# Altium PCB BMS_slave.PcbDoc (part 1 of 5)
Units mm, origin at the board's own origin, x right, y up, seen from the top; angles counter-clockwise.
Board outline 124.71 x 100.58 mm, 4 copper layers (Layer 1 - Top Layer, Layer 2 - GND, Layer 3 - Signal, Layer 4 - Bottom Layer), stack 1.56 mm thick; 370 components, 202 nets, 969 pads, 371 vias.
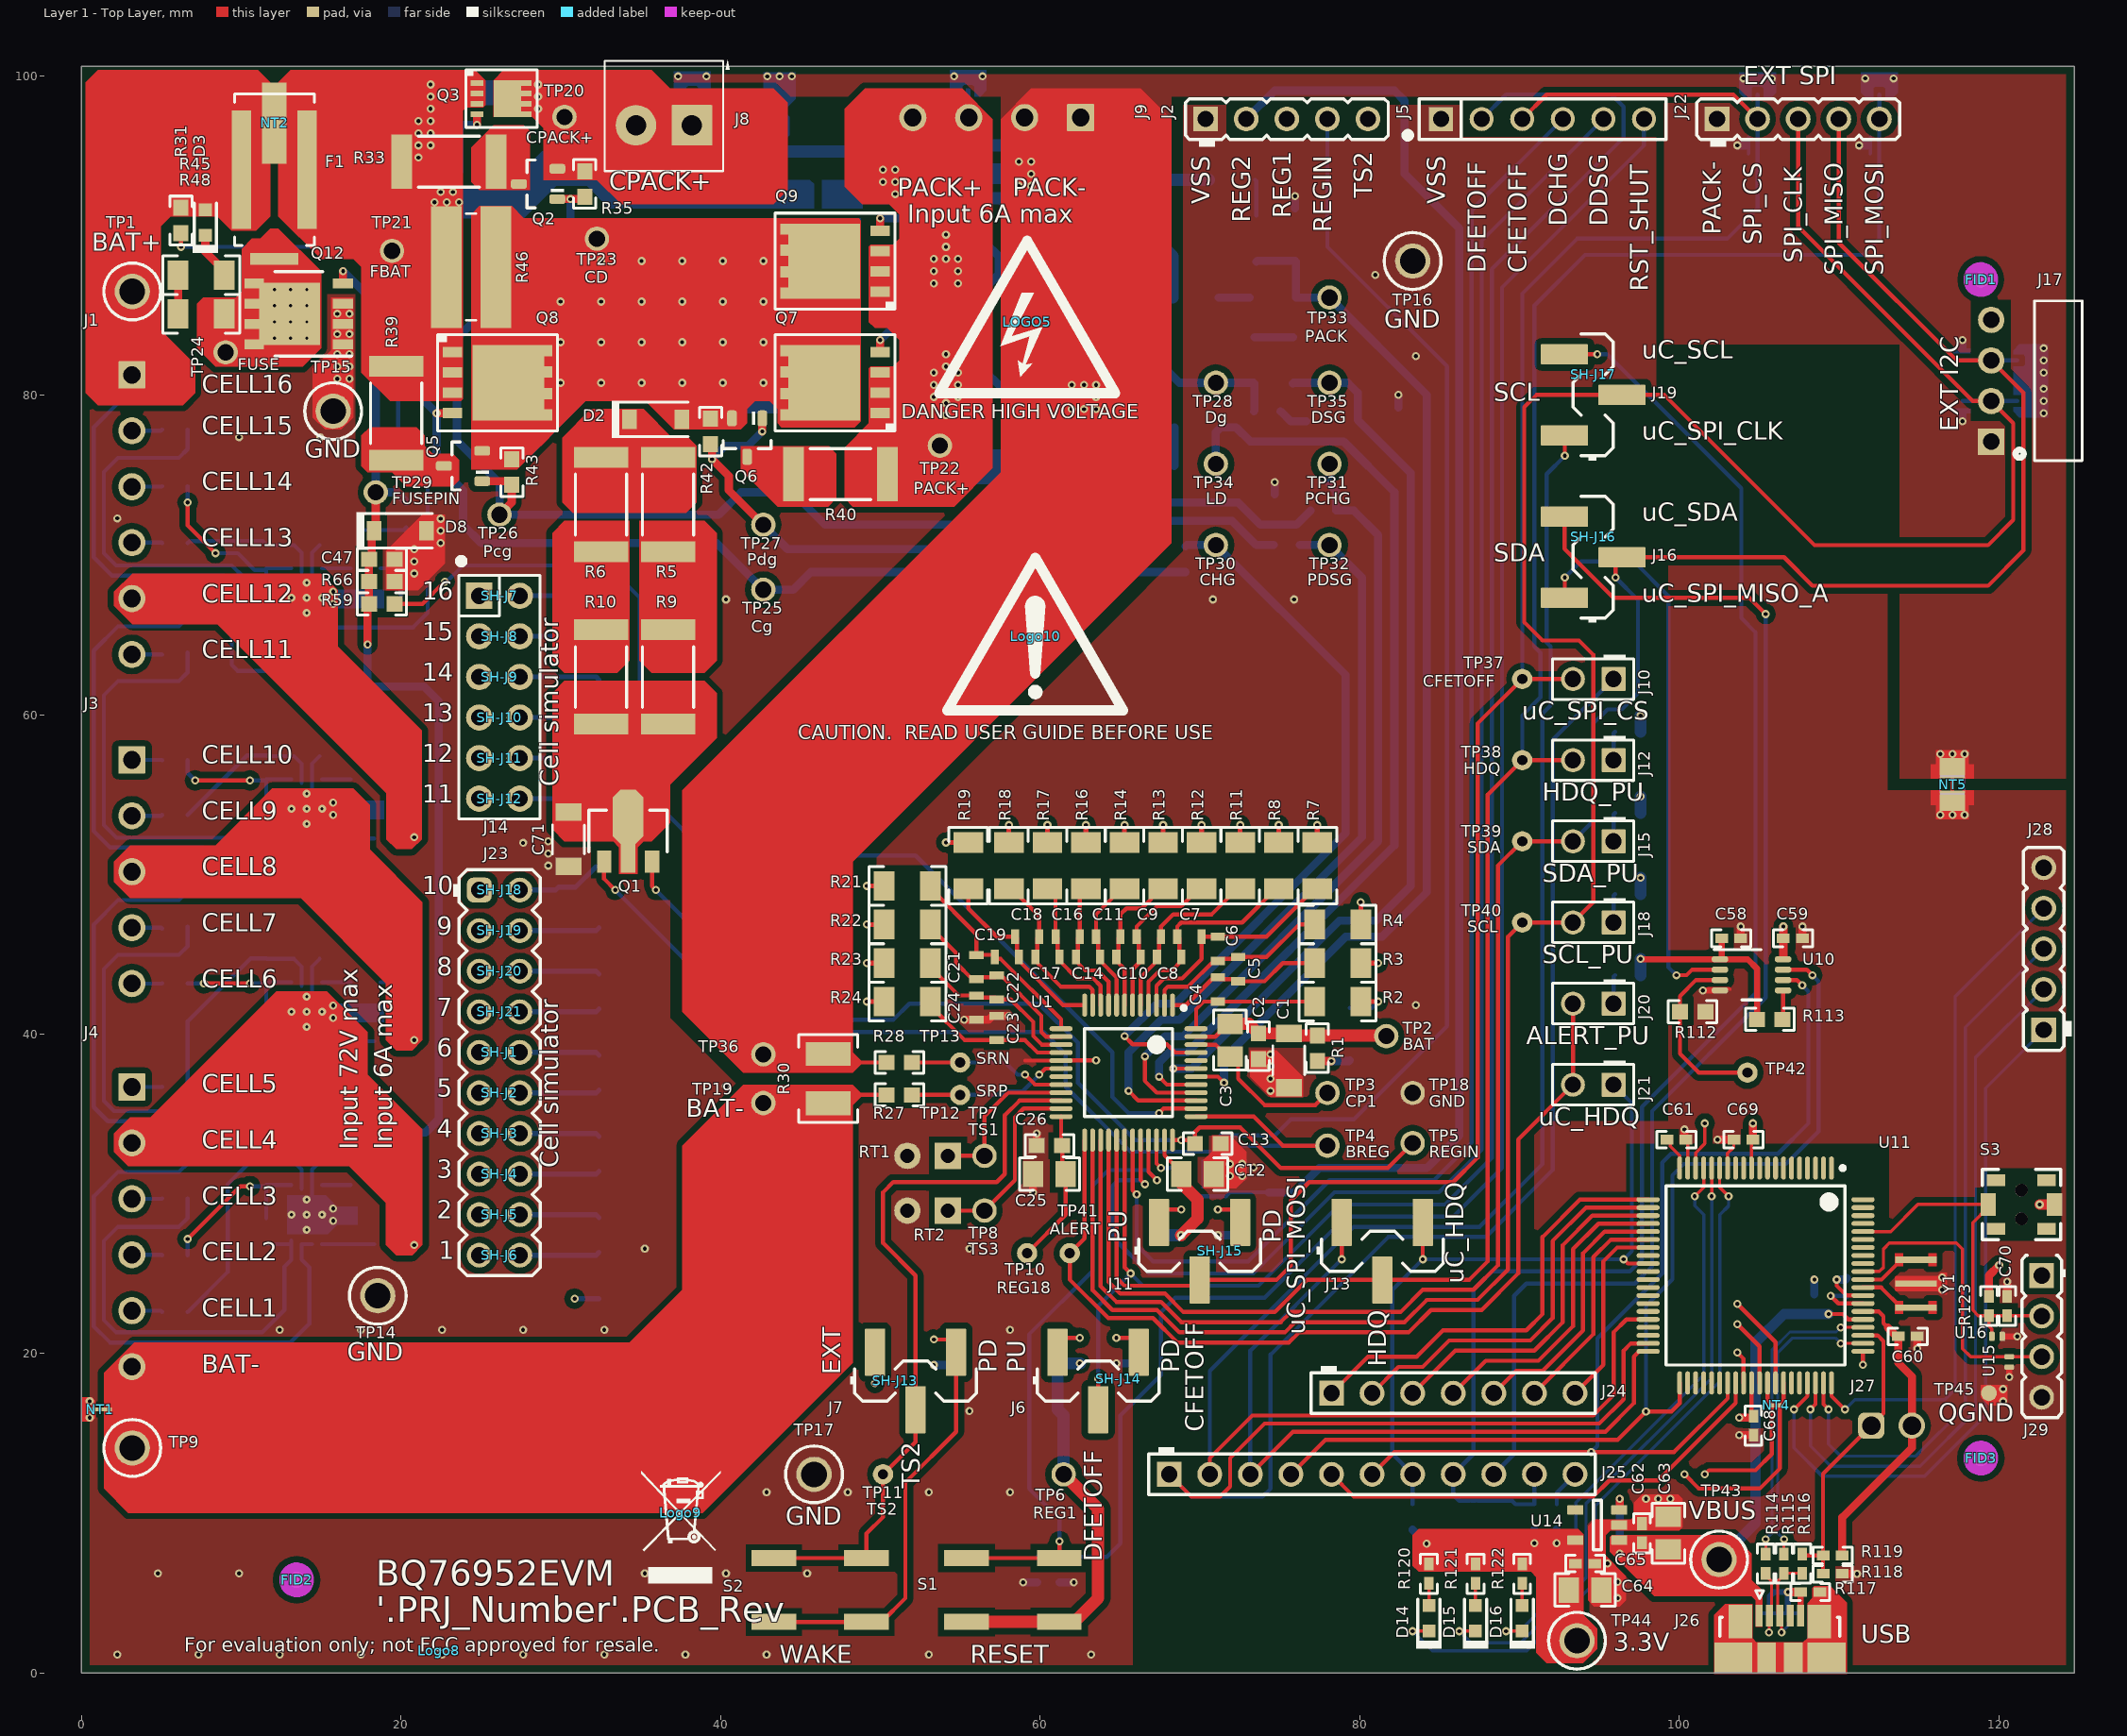
[diagram p0: Layer 1 - Top Layer view]
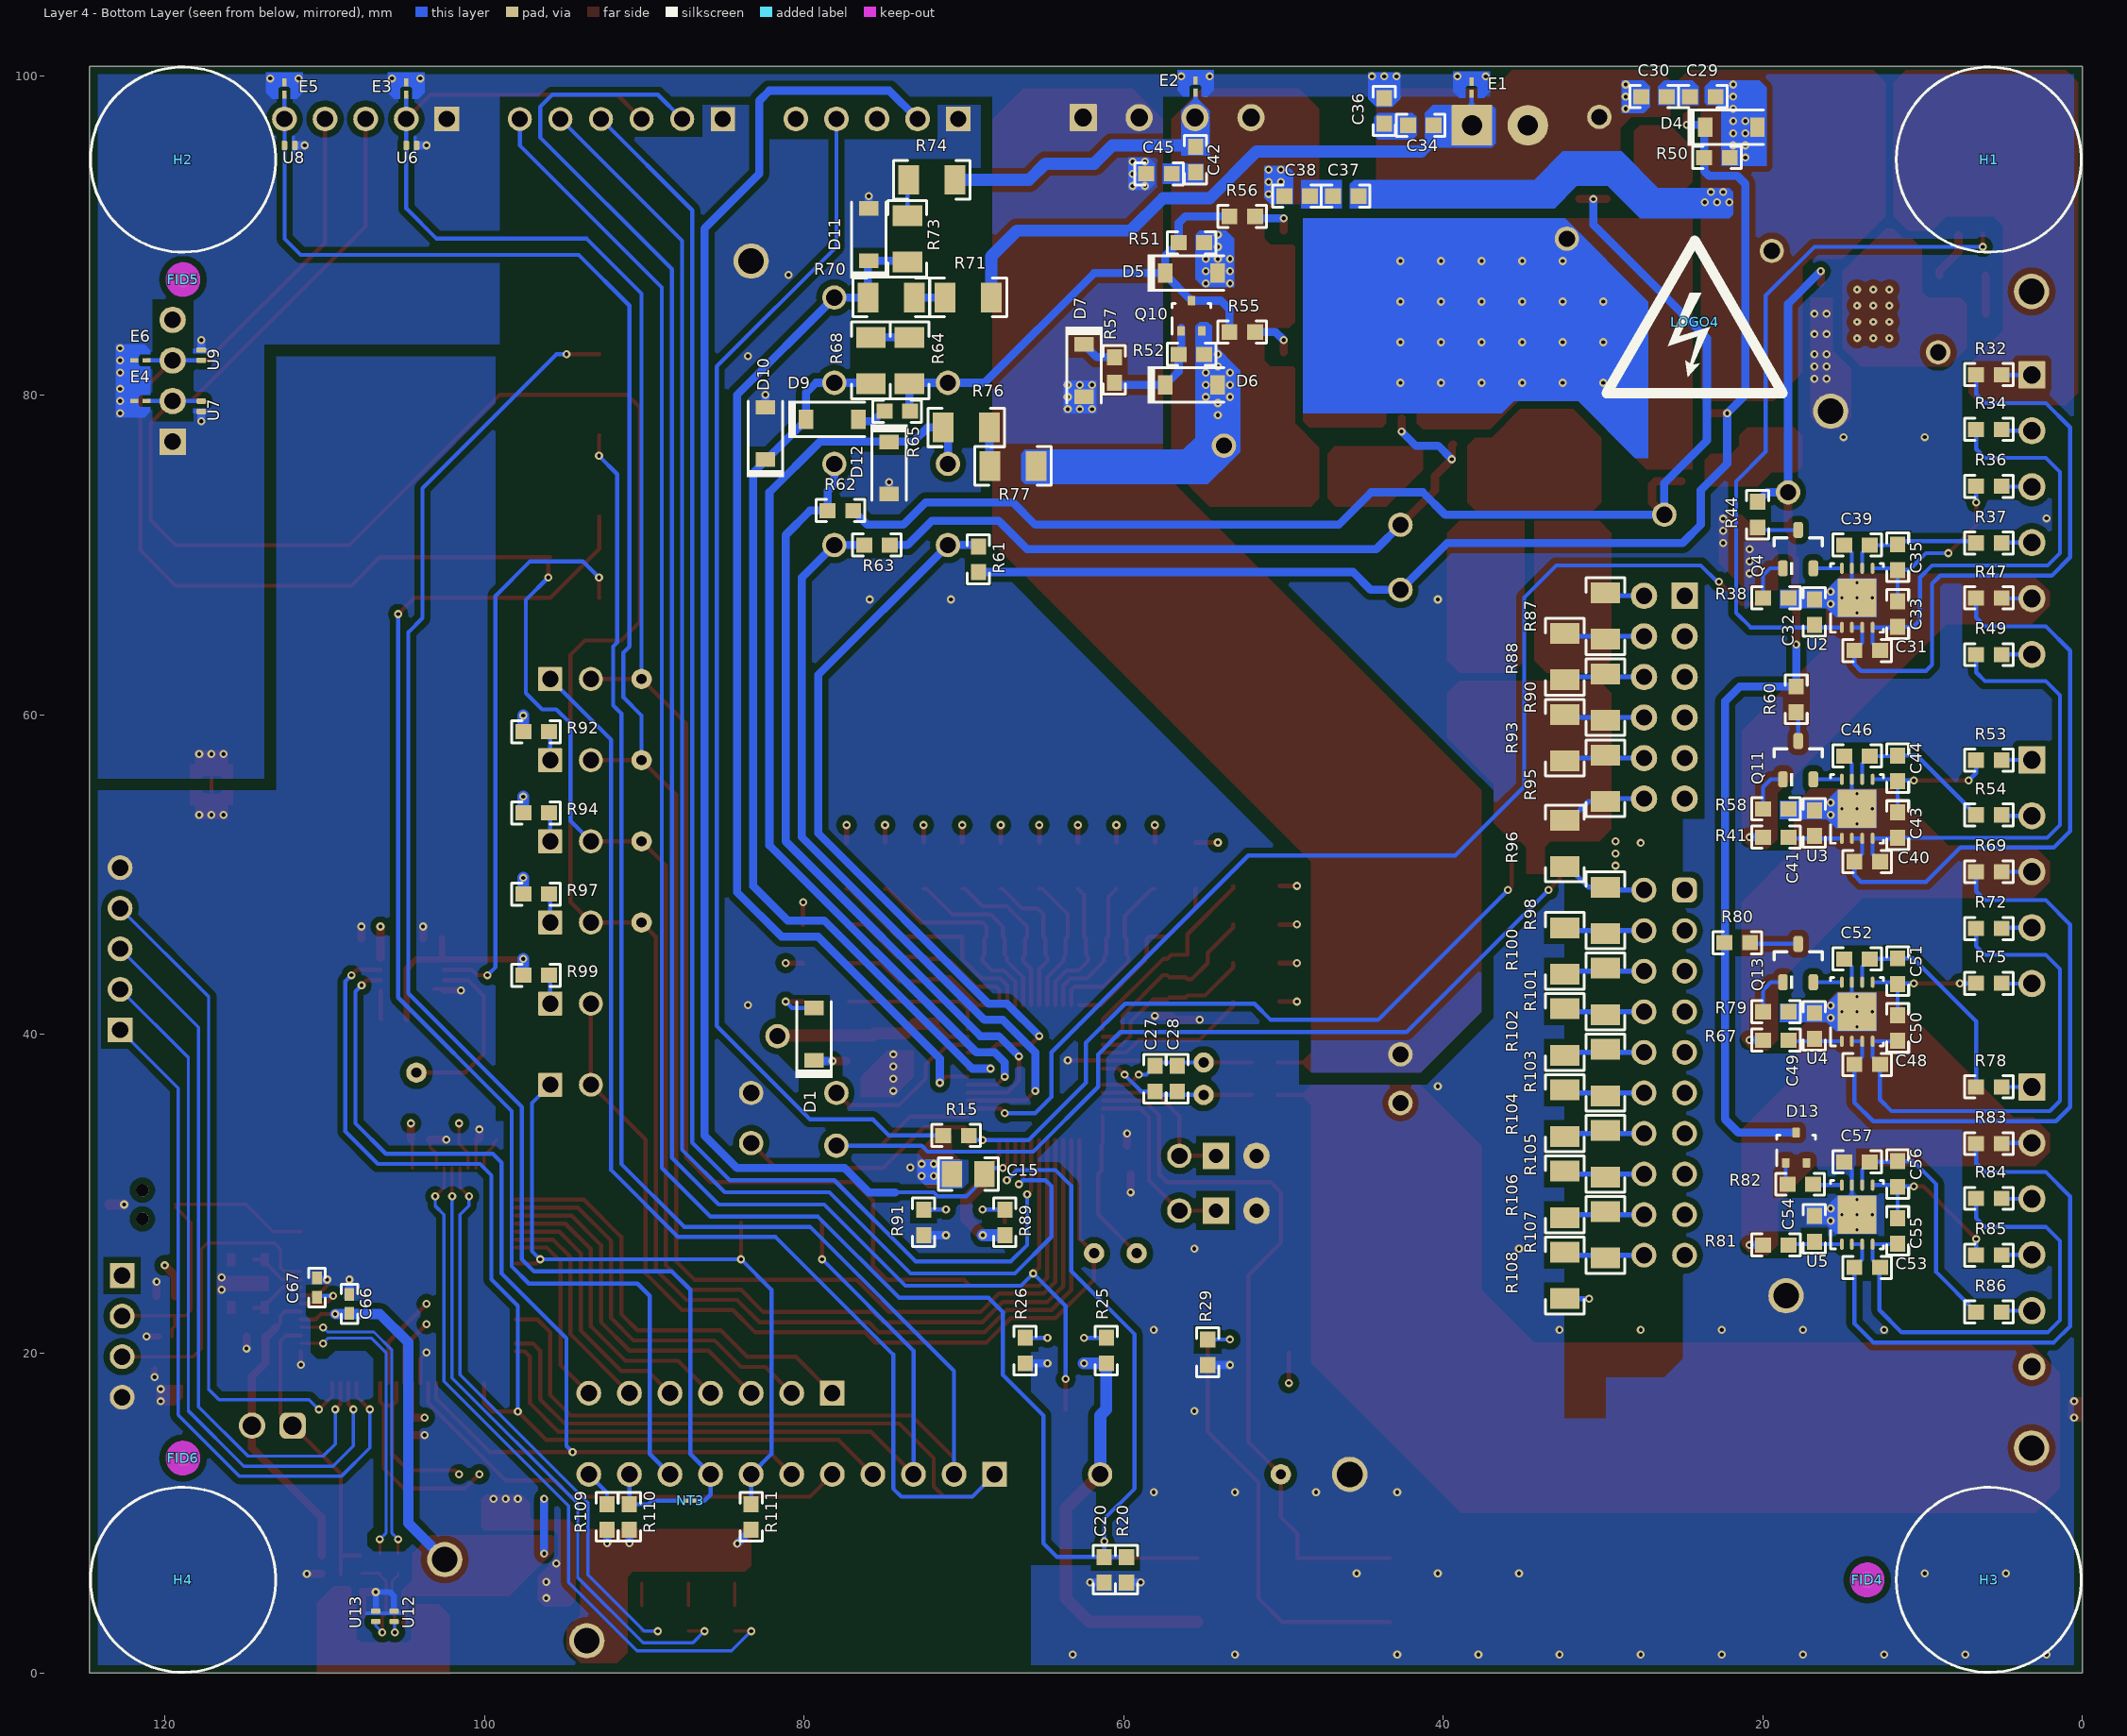
[diagram p1: Layer 4 - Bottom Layer view, seen from below]
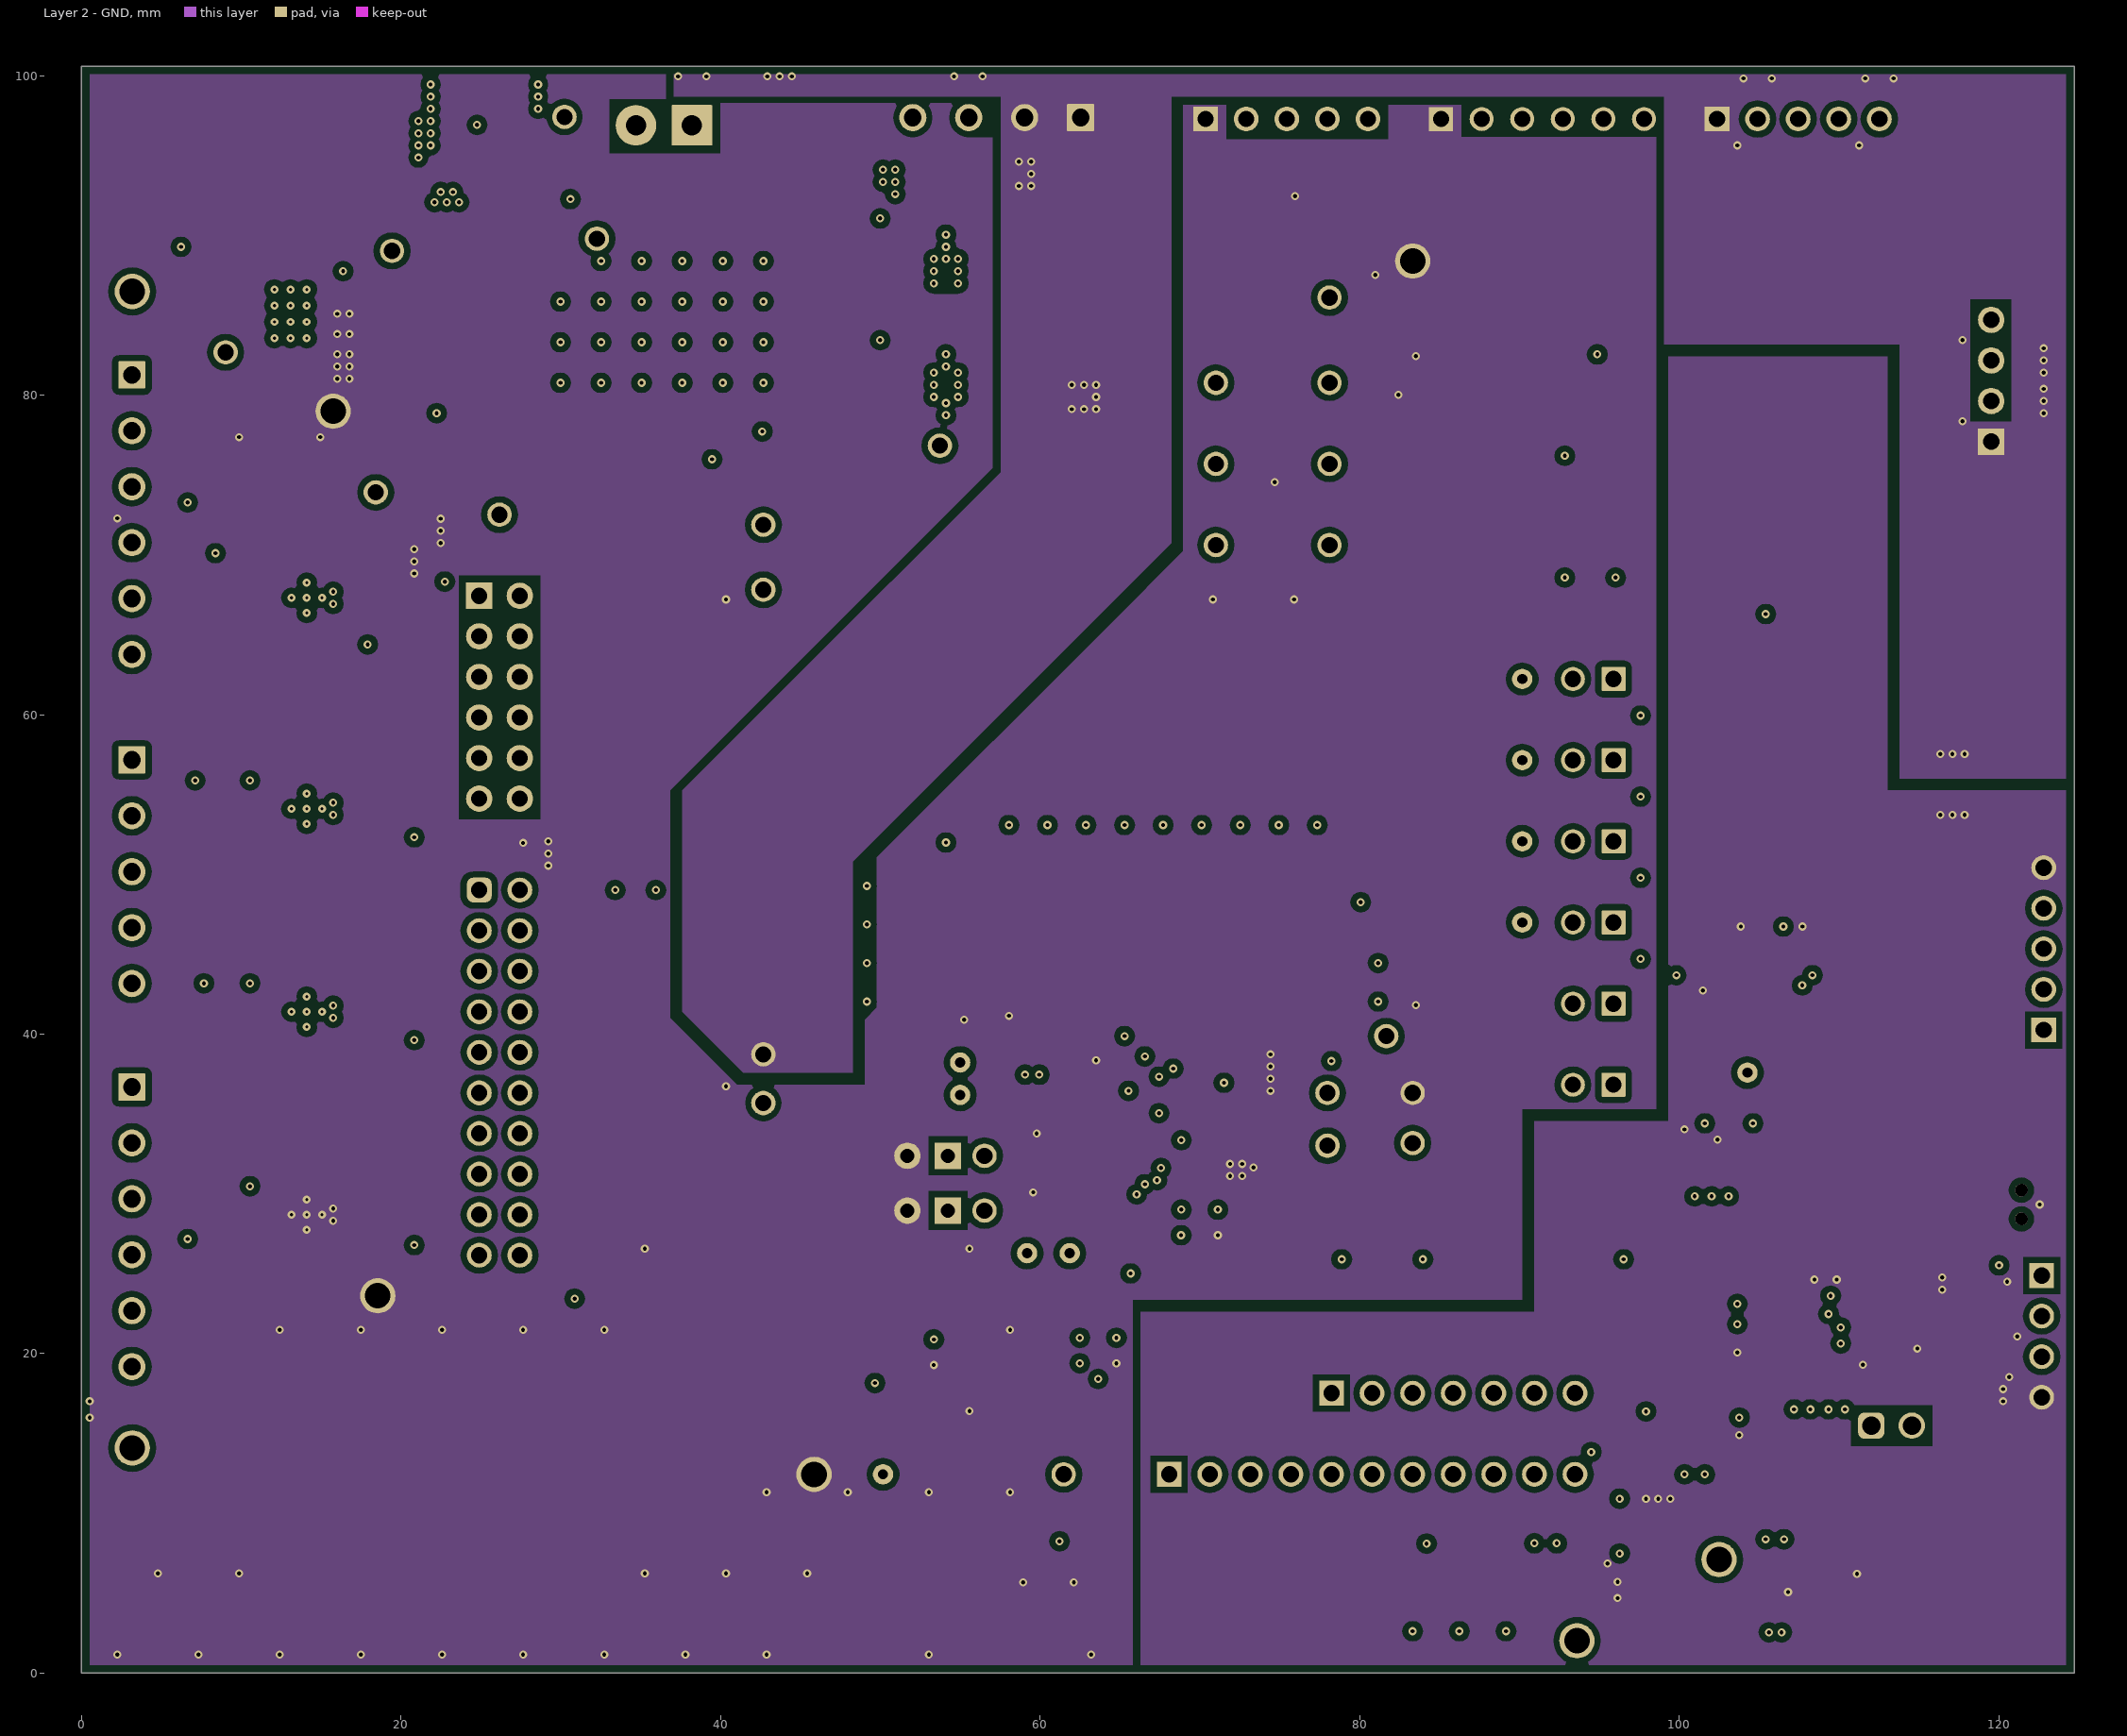
[diagram p2: Layer 2 - GND]
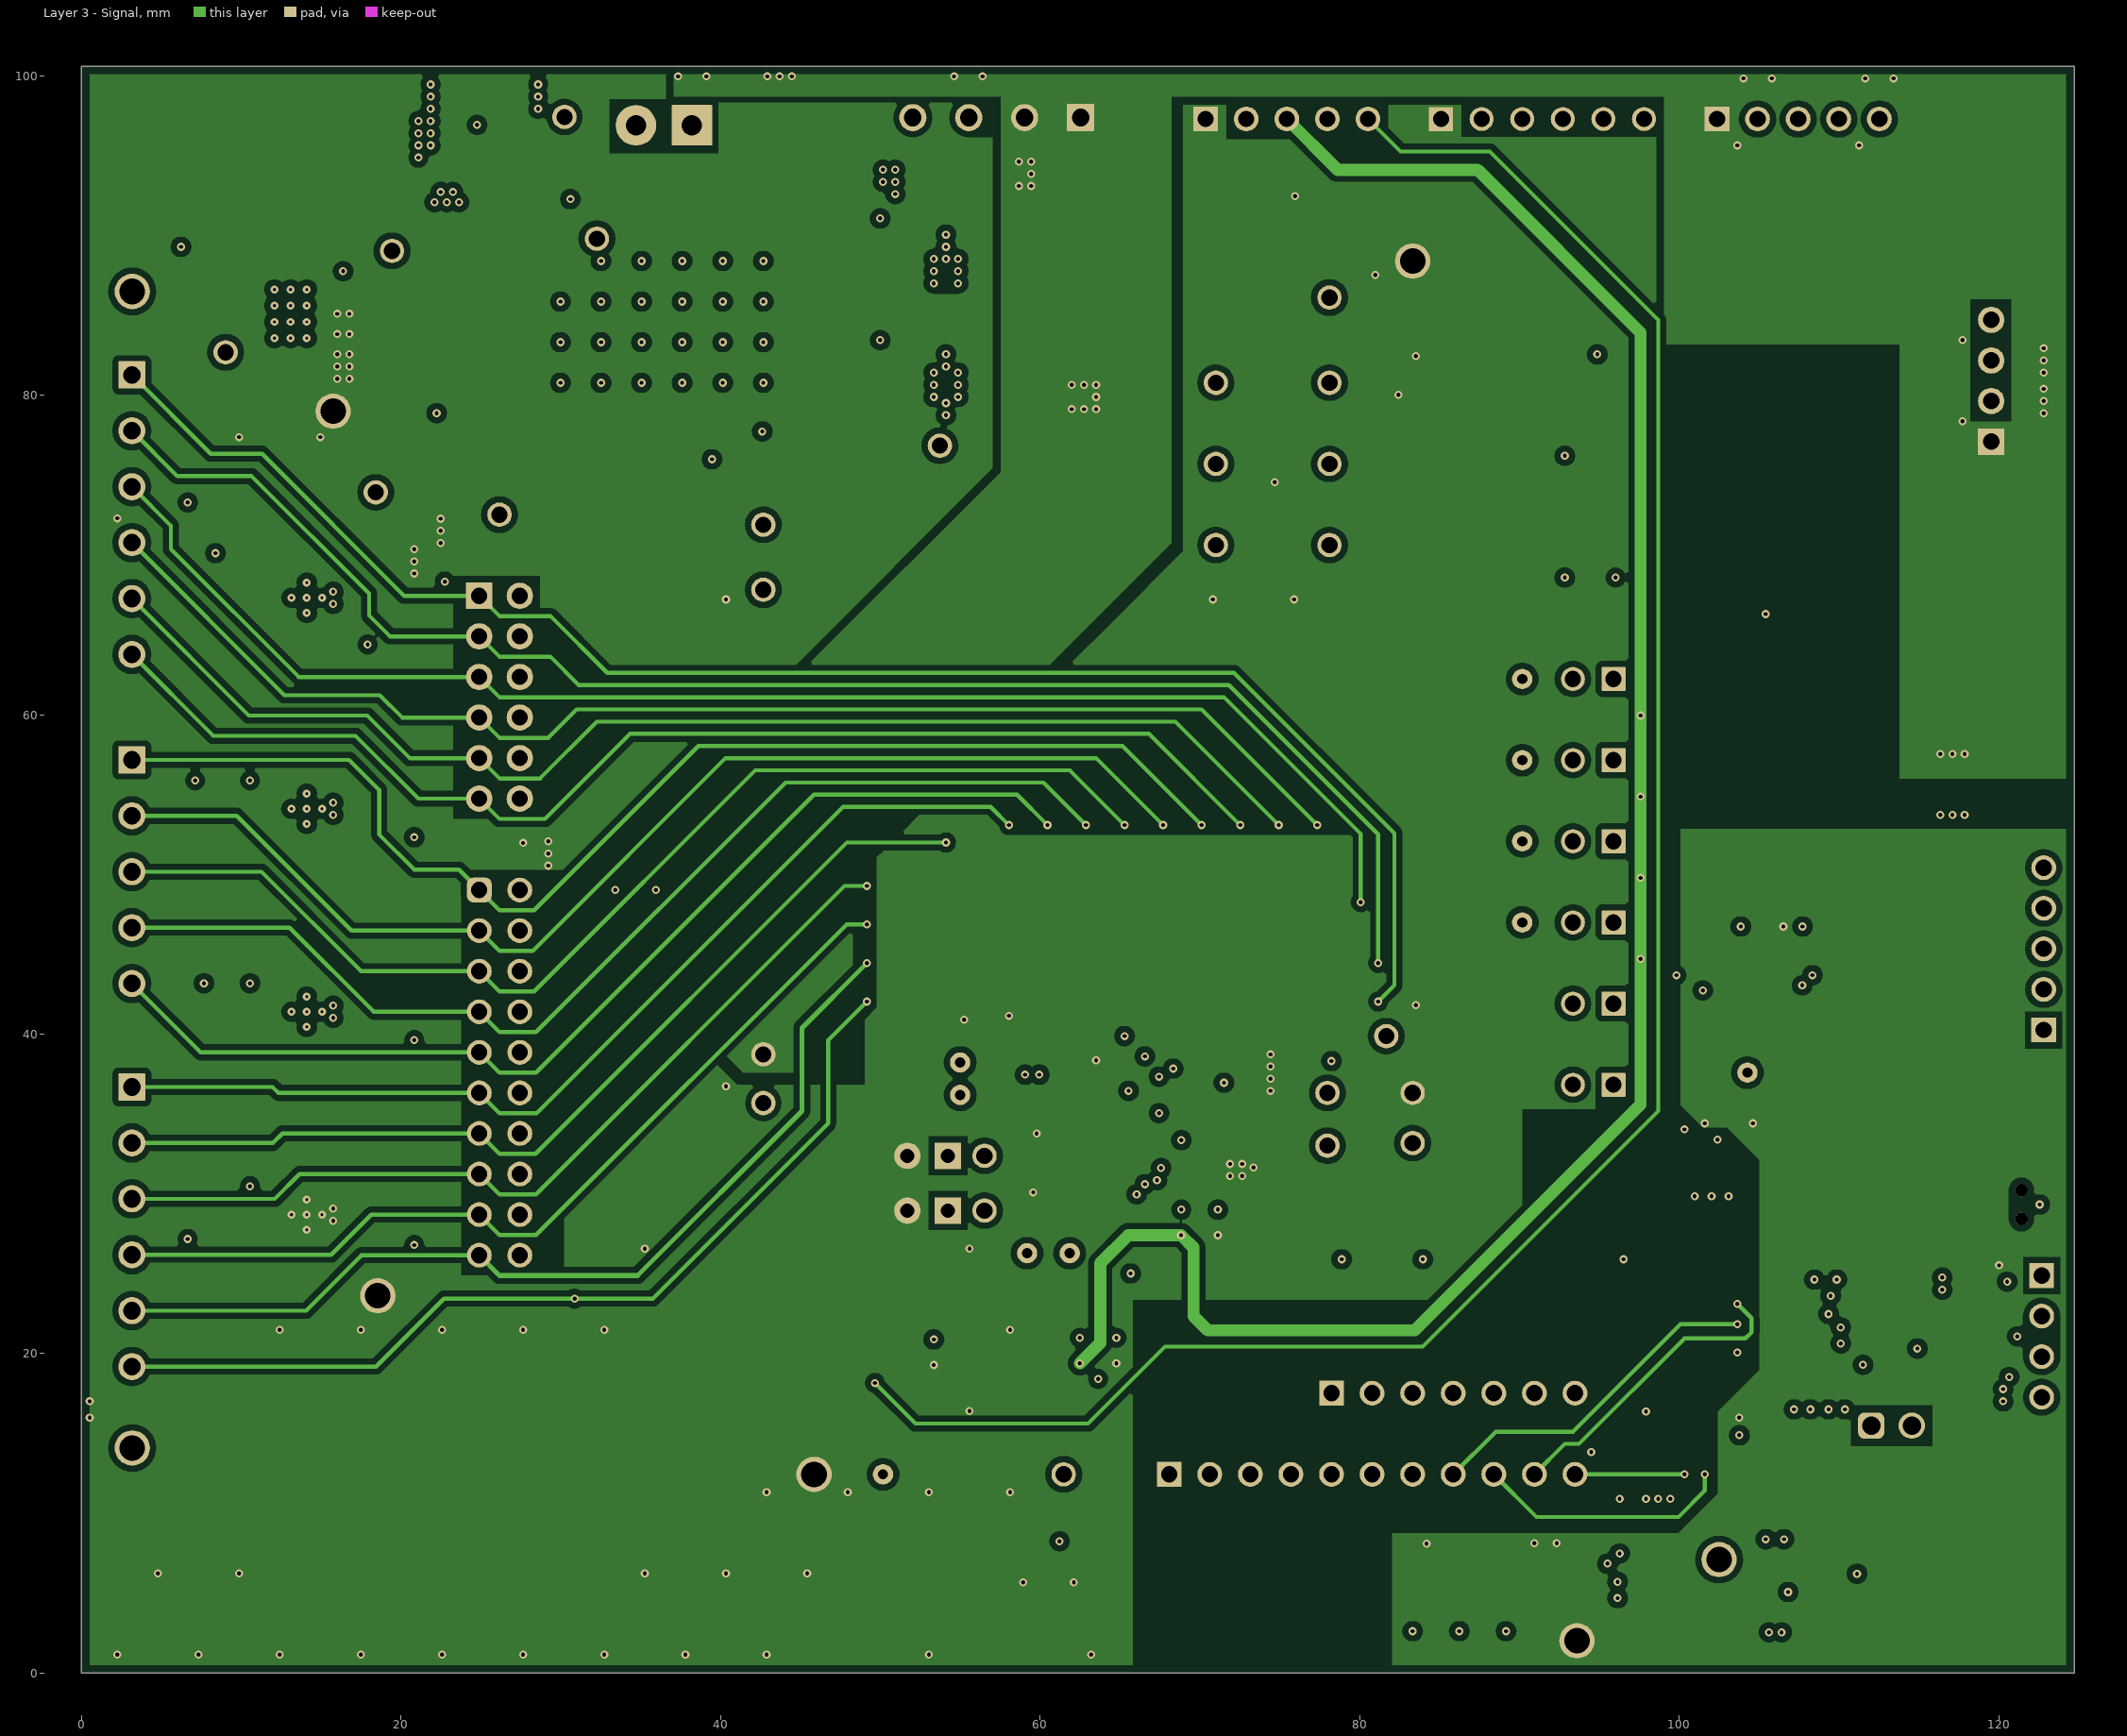
[diagram p3: Layer 3 - Signal]

## Layer stack, top to bottom
Top Solder: solder mask 0.0102, Solder Resist, Dk 3.5
Layer 1 - Top Layer: signal copper 0.0711
Dielectric 1: prepreg 0.1524, FR-4 High Tg, Dk 4.2
Layer 2 - GND: signal copper 0.0356
Dielectric 2: core 1.0414, FR-4 High Tg, Dk 4.2
Layer 3 - Signal: signal copper 0.0356
Dielectric 3: prepreg 0.1524, FR-4 High Tg, Dk 4.2
Layer 4 - Bottom Layer: signal copper 0.0711
Bottom Solder: solder mask 0.0102, Solder Resist, Dk 3.5

## Board outline
124.714,100.584 124.714,0 0,0 0,100.584

## Design rules (kind name [scope] priority, off if disabled: settings)
AcuteAngle [All] p1: minimum=4.50000000000000E+0001 checktracksonly=FALSE
AssemblyTestPointUsage [All] p1: valid=2
BoardOutlineClearance BoardOutlineClearance_MountingHoles [OnCopper and InComponentClass('Mounting Holes')] p1: gap=1 ignorepadtopadclearanceinfootprint=FALSE
BoardOutlineClearance BoardOutlineClearance_Poly [OnCopper and IsPoly] p2: gap=0.508 ignorepadtopadclearanceinfootprint=FALSE
BoardOutlineClearance [OnCopper and Not InComponentClass('Logo') and not InComponentClass('FiducialMark') and not InRegion(1000,500,4000,800) and not InPoly] p3: gap=0.457 ignorepadtopadclearanceinfootprint=FALSE
Clearance Clearance_Keepouts [((IsTrack Or IsArc) And Not InPoly) And IsFree and IsKeepOut vs ((IsTrack Or IsArc) And Not InPoly) And IsFree and IsKeepOut] p1: gap=0 ignorepadtopadclearanceinfootprint=FALSE
Clearance Clearance_Poly [InPolygon] p2: gap=0.381 ignorepadtopadclearanceinfootprint=FALSE except(0: Arc-Hole Track-Hole SMDPad-Hole THPad-Hole Via-Hole Fill-Hole Poly-Hole Region-Hole Text-Hole)
Clearance Clearance_FiducialMark [IsKeepOut and InComponentClass('FiducialMark') vs IsPad and InComponentClass('FiducialMark')] p3: gap=0 ignorepadtopadclearanceinfootprint=FALSE
Clearance [All] p4: gap=0.2 ignorepadtopadclearanceinfootprint=FALSE except(0: Arc-Hole Track-Hole SMDPad-Hole THPad-Hole Via-Hole Fill-Hole Poly-Hole Region-Hole Text-Hole)
ComponentClearance "ComponentClearance_TP / Logo" [HasFootprint('IEC_HotSurface_Medium')] p1: gap=0 collisioncheckmode=3 verticalgap=0 showdistances=FALSE // IEC_HotSurface_Medium
ComponentClearance ComponentClearance_Net-tie [HasFootprint('Net-Tie_10mil') or HasFootprint('Net-Tie_50milWide_30milLong')] p2: gap=0 collisioncheckmode=3 verticalgap=0 showdistances=FALSE
ComponentClearance ComponentClearance_MountingHoles_FiducialMarks [InComponentClass('Mounting Holes') vs InComponentClass('FiducialMark')] p3: gap=0.254 collisioncheckmode=3 verticalgap=0.254 showdistances=FALSE
ComponentClearance ComponentClearance_Shunt [HasFootprint('SNT-100-BK-G')] p4: gap=0 collisioncheckmode=3 verticalgap=0 showdistances=TRUE
ComponentClearance ComponentClearance_Logo [InComponentClass('Logo')] p5: gap=0 collisioncheckmode=3 verticalgap=0 showdistances=FALSE
ComponentClearance ComponentClearance_ScrewToNut [(HasFootprint('NY PMS 440 0025 PH')) vs (HasFootprint('Keystone_1902C'))] p6: gap=0.127 collisioncheckmode=3 verticalgap=0.254 showdistances=FALSE
ComponentClearance ComponentClearance_MountingHoles [InComponentClass('Mounting Holes')] p7: gap=6.35 collisioncheckmode=3 verticalgap=2540 showdistances=FALSE
ComponentClearance ComponentClearance_SmallPassives [HasFootprint('0201*') or HasFootprint('0402*') or HasFootprint('0508') or HasFootprint('0603*') or HasFootprint('0612') or HasFootprint('0805*') or HasFootprint('0815*') or HasFootprint('0830*') or HasFootprint('1206*') or HasFootprint('1210*') or HasFootprint('1808*') or HasFootprint('1812*') or HasFootprint('1825*') or HasFootprint('2010*') or HasFootprint('2220*') or HasFootprint('2225*') or HasFootprint('2512*') or HasFootprint('2728*') or HasFootprint('3518*') vs HasFootprint('0201*') or HasFootprint('0402*') or HasFootprint('0508') or HasFootprint('0603*') or HasFootprint('0612') or HasFootprint('0805*') or HasFootprint('0815*') or HasFootprint('0830*') or HasFootprint('1206*') or HasFootprint('1210*') or HasFootprint('1808*') or HasFootprint('1812*') or HasFootprint('1825*') or HasFootprint('2010*') or HasFootprint('2220*') or HasFootprint('2225*') or HasFootprint('2512*') or HasFootprint('2728*') or HasFootprint('3518*')] p8: gap=0.254 collisioncheckmode=3 verticalgap=0.254 showdistances=FALSE
ComponentClearance ComponentClearance_THtoSMT [IsThruComponent vs IsSMTComponent] p9: gap=0.254 collisioncheckmode=3 verticalgap=0.762 showdistances=FALSE
ComponentClearance ComponentClearance_THtoTH [IsThruComponent vs IsThruComponent] p10: gap=0.254 collisioncheckmode=3 verticalgap=0.762 showdistances=FALSE
ComponentClearance [All] p11: gap=0.254 collisioncheckmode=3 verticalgap=0.254 showdistances=FALSE
DiffPairsRouting [All] p1: maxlimit=2.54 minlimit=0.254 mostfreqgap=0.254 toplayer_minwidth=0.381 toplayer_maxwidth=0.381 toplayer_prefwidth=0.381 midlayer1_minwidth=0.381 midlayer1_maxwidth=0.381 midlayer1_prefwidth=0.381 midlayer2_minwidth=0.381 midlayer2_maxwidth=0.381 midlayer2_prefwidth=0.381 bottomlayer_minwidth=0.381 bottomlayer_maxwidth=0.381 bottomlayer_prefwidth=0.381 maxuncoupledlength=25.4
FabricationTestPointUsage TestPointUsage [All] p1: valid=2 allowmultiple=FALSE
FabricationTestpoint Testpoint [All] p1: side=3 testpointundercomponent=TRUE minsize=1.016 maxsize=2.54 preferedsize=1.524 minholesize=0 maxholesize=1.016 preferedholesize=0.813 testpointgrid=0.025 allowsidetop=TRUE allowsidebottom=TRUE usegrid=TRUE gridtolerance=0
FanoutControl Fanout_LCC [IsLCC] p1: bgadir=Out bgaviamode=Centered fanoutstyle=Auto fanoutdirection=Alternating viagrid=0.025 // Fanout_LCC (Default Rule)
FanoutControl Fanout_BGA [IsBGA] p2: bgadir=Out bgaviamode=Centered fanoutstyle=Auto fanoutdirection=Alternating viagrid=0.025 // Fanout_BGA (Default Rule)
FanoutControl Fanout_Default [All] p4: bgadir=Out bgaviamode=Centered fanoutstyle=Auto fanoutdirection=Alternating viagrid=0.025 // Fanout_Default (Default Rule)
FanoutControl Fanout_Small [(CompPinCount < 5)] p5: bgadir=Out bgaviamode=Centered fanoutstyle=Auto fanoutdirection=OutThenIn viagrid=0.025 // Fanout_Small (Default Rule)
HoleSize [All] p1: absolutevalues=TRUE maxlimit=6.375 minlimit=0.2 maxpercent=80.000 minpercent=20.000
MinimumAnnularRing MinimumAnnularRing_ThermalPadVias [IsVia and InAnyComponent] p1: minimumring=0.15
MinimumAnnularRing [All] p2: minimumring=0.127
MinimumSolderMaskSliver MinimumSolderMaskSliver_Logo [InComponentClass('Logo') vs InComponentClass('Logo')] p1: minsoldermaskwidth=0.018
MinimumSolderMaskSliver [All] p2: minsoldermaskwidth=0.099
PlaneConnect [All] p1: planeconnectstyle=Relief reliefexpansion=0.254 reliefentries=4 reliefconductorwidth=0.254 reliefairgap=0.254
PolygonConnect [All] p1: connectstyle=Direct reliefconductorwidth=0.254 reliefentries=4 polygonreliefangle="90 Angle" airgapwidth=0.254
RoutingVias ThermalPadVias [IsVia and InAnyComponent] p1: holewidth=0.2 width=0.5 viastyle="Through Hole" minholewidth=0.2 minwidth=0.5 maxholewidth=0.33 maxwidth=0.6
RoutingVias [All] p2: holewidth=0.406 width=0.864 viastyle="Through Hole" minholewidth=0.2 minwidth=0.508 maxholewidth=1.016 maxwidth=1.651
SilkToBoardRegionClearance [Not ((IsComment or IsDesignator) And (Hide <> 'False')) and not InRegion(1000,500,4000,800)] p1:
SilkToSilkClearance SilkToSilkClearance_Pb-FreeLogo [(HasFootprint('Pb-Free_Overlay_Medium') OR HasFootprint('Pb-Free_Overlay_Small')) vs (HasFootprint('Pb-Free_Overlay_Medium') OR HasFootprint('Pb-Free_Overlay_Small'))] p1: silktosilkclearance=0
SilkToSilkClearance [All] p2: silktosilkclearance=0.099
SilkToSolderMaskClearance SilkToComponentPadClearance [(IsPad or IsFill or IsRegion) and InAnycomponent] p1: minsilkscreentomaskgap=0.127 clearancetoexposedcopper=TRUE
SilkToSolderMaskClearance "Silk to Solder Mask Opening" [All] p2: minsilkscreentomaskgap=0.1 clearancetoexposedcopper=FALSE
SolderMaskExpansion [All] p1: expansion=0.05 istentingtop=FALSE
Width [All] p1: maxlimit=2.54 minlimit=0.152 preferedwidth=0.254 checkconnectedcopper=TRUE
15 further rules are at their usual default settings.

## Classes and differential pairs
component class Shunt: SH-J1 SH-J2 SH-J3 SH-J4 SH-J5 SH-J6 SH-J7 SH-J8 SH-J9 SH-J10 SH-J11 SH-J12 SH-J13 SH-J14 SH-J15 SH-J16 SH-J17 SH-J18 SH-J19 SH-J20 SH-J21
component class Header: J2 J5 J6 J7 J10 J11 J12 J13 J14 J15 J16 J18 J19 J20 J21 J22 J23 J24 J25 J27 J28 J29
component class BMS029B_PinConfig: E3 E4 E5 E6 J10 J11 J12 J13 J14 J15 J16 J17 J18 J19 J20 J21 J22 J23 R87 R88 R89 R90 R91 R92 R93 R94 R95 R96 R97 R98 R99 R100 R101 R102 R103 R104 R105 R106 R107 R108 TP37 TP38 TP39 TP40 TP41 U6 U7 U8 U9
component class BMS029B_Monitor: C1 C2 C3 C4 C5 C6 C7 C8 C9 C10 C11 C12 C13 C14 C15 C16 C17 C18 C19 C20 C21 C22 C23 C24 C25 C26 C27 C28 C71 D1 D2 J1 J2 J3 J4 J5 J6 J7 NT1 Q1 R1 R2 R3 R4 R5 R6 R7 R8 R9 R10 R11 R12 R13 R14 R15 R16 R17 R18 R19 R20 R21 R22 R23 R24 R25 R26 R27 R28 R29 R30 RT1 RT2 S1 S2 TP1 TP2 TP3 TP4 TP5 TP6 TP7 TP8 TP9 TP10 TP11 TP12 TP13 TP14 TP15 TP16 TP17 TP18 TP19 U1
component class BMS029B_Interface: C58 C59 C60 C61 C62 C63 C64 C65 C66 C67 C68 C69 C70 D14 D15 D16 J24 J25 J26 J27 J28 J29 NT3 NT4 NT5 R109 R110 R111 R112 R113 R114 R115 R116 R117 R118 R119 R120 R121 R122 R123 S3 TP42 TP43 TP44 TP45 U10 U11 U12 U13 U14 U15 U16 Y1
component class BMS029B_FETs: C29 C30 C31 C32 C33 C34 C35 C36 C37 C38 C39 C40 C41 C42 C43 C44 C45 C46 C47 C48 C49 C50 C51 C52 C53 C54 C55 C56 C57 D3 D4 D5 D6 D7 D8 D9 D10 D11 D12 D13 E1 E2 F1 J8 J9 NT2 Q2 Q3 Q4 Q5 Q6 Q7 Q8 Q9 Q10 Q11 Q12 Q13 R31 R32 R33 R34 R35 R36 R37 R38 R39 R40 R41 R42 R43 R44 R45 R46 R47 R48 R49 R50 R51 R52 R53 R54 R55 R56 R57 R58 R59 R60 R61 R62 R63 R64 R65 R66 R67 R68 R69 R70 R71 R72 R73 R74 R75 R76 R77 R78 R79 R80 R81 R82 R83 R84 R85 R86 TP20 TP21 TP22 TP23 TP24 TP25 TP26 TP27 TP28 TP29 TP30 TP31 TP32 TP33 TP34 TP35 TP36 U2 U3 U4 U5
component class BMS029B_Hardware: FID1 FID2 FID3 FID4 FID5 FID6 H1 H2 H3 H4 LOGO4 LOGO5 Logo8 Logo9 Logo10 SH-J1 SH-J2 SH-J3 SH-J4 SH-J5 SH-J6 SH-J7 SH-J8 SH-J9 SH-J10 SH-J11 SH-J12 SH-J13 SH-J14 SH-J15 SH-J16 SH-J17 SH-J18 SH-J19 SH-J20 SH-J21 ZZ1 ZZ2 ZZ3
component class FiducialMark: FID1 FID2 FID3 FID4 FID5 FID6
component class AssemblyNote: ZZ1 ZZ2 ZZ3

## Components (designator, comment, footprint, x,y, rotation, side; value= is the part's Value field where it differs from the comment)
C1 "C3216X7R2A105K160AA" 1206_180 75.565,38.354 r270 top value=1uF
C2 "GCM1885C2A101JA16D" 0603 73.66,39.243 r270 top value=100pF
C3 "GCM219R71E474KA55D" 0805_HV 71.882,39.624 r270 top value=0.47uF
C4 "C1608X7R1H224K080AB" 0603S 71.12,42.799 r90 top value=0.22uF
C5 "C1608X7R1H224K080AB" 0603S 72.39,44.069 r90 top value=0.22uF
C6 "C1608X7R1H224K080AB" 0603S 71.12,45.339 r90 top value=0.22uF
C7 "C1608X7R1H224K080AB" 0603S 69.342,46.101 r180 top value=0.22uF
C8 "C1608X7R1H224K080AB" 0603S 68.072,44.831 r180 top value=0.22uF
C9 "C1608X7R1H224K080AB" 0603S 66.802,46.101 r180 top value=0.22uF
C10 "C1608X7R1H224K080AB" 0603S 65.532,44.831 r180 top value=0.22uF
C11 "C1608X7R1H224K080AB" 0603S 64.262,46.101 r180 top value=0.22uF
C12 "EMK212B7105KG-T" 0805_HV 69.85,31.242 r180 top value=1uF
C13 "C0603C223K4RACTU" 0603 70.485,33.147 r180 top value=0.022uF
C14 "C1608X7R1H224K080AB" 0603S 62.992,44.831 r180 top value=0.22uF
C15 "EMK212B7105KG-T" 0805_HV 69.723,31.242 r180 bottom value=1uF
C16 "C1608X7R1H224K080AB" 0603S 61.722,46.101 r180 top value=0.22uF
C17 "C1608X7R1H224K080AB" 0603S 60.452,44.831 r180 top value=0.22uF
C18 "C1608X7R1H224K080AB" 0603S 59.182,46.101 r180 top value=0.22uF
C19 "C1608X7R1H224K080AB" 0603S 57.912,44.831 r180 top value=0.22uF
C20 "885012206040" 0603 61.214,6.477 r270 bottom value=0.01uF
C21 "C1608X7R1H224K080AB" 0603S 56.007,44.196 r270 top value=0.22uF
C22 "C1608X7R1H224K080AB" 0603S 57.277,42.926 r270 top value=0.22uF
C23 "C1608X7R1H224K080AB" 0603S 57.277,40.386 r90 top value=0.22uF
C24 "C1608X7R1H224K080AB" 0603S 56.007,41.656 r270 top value=0.22uF
C25 "EMK212B7225KG-T" 0805_HV 60.579,31.242 r0 top value=2.2uF
C26 "885012206040" 0603 60.579,33.02 r180 top value=0.01uF
C27 "C0603C101J5GACTU" 0603 58.039,37.211 r270 bottom value=100pF
C28 "885012206095" 0603 56.642,37.211 r90 bottom value=0.1uF
C29 "GCJ188R72A104KA01D" 0603 23.749,98.679 r180 bottom value=0.1uF
C30 "GCJ188R72A104KA01D" 0603 26.797,98.679 r180 bottom value=0.1uF
C31 "885012206095" 0603 13.462,64.008 r0 bottom value=0.1uF
C32 "885012206095" 0603 16.764,66.421 r270 bottom value=0.1uF
C33 "885012206095" 0603 11.557,66.294 r270 bottom value=0.1uF
C34 "GCJ188R72A104KA01D" 0603 41.402,96.888 r0 bottom value=0.1uF
C35 "885012206095" 0603 11.557,69.85 r270 bottom value=0.1uF
C36 "GCJ188R72A104KA01D" 0603 43.688,97.79 r90 bottom value=0.1uF
C37 "GCJ188R72A104KA01D" 0603 46.101,92.456 r180 bottom value=0.1uF
C38 "GCJ188R72A104KA01D" 0603 49.149,92.456 r180 bottom value=0.1uF
C39 "885012206095" 0603 14.097,70.612 r180 bottom value=0.1uF
C40 "885012206095" 0603 13.462,50.8 r0 bottom value=0.1uF
C41 "885012206095" 0603 16.764,53.213 r270 bottom value=0.1uF
C42 "GCJ188R72A104KA01D" 0603 55.499,94.742 r270 bottom value=0.1uF
C43 "885012206095" 0603 11.557,53.086 r270 bottom value=0.1uF
C44 "885012206095" 0603 11.557,56.642 r270 bottom value=0.1uF
C45 "GCJ188R72A104KA01D" 0603 57.785,93.853 r0 bottom value=0.1uF
C46 "885012206095" 0603 14.097,57.404 r180 bottom value=0.1uF
C47 "885012206095" 0603 18.796,69.723 r180 top value=0.1uF
C48 "885012206095" 0603 13.462,38.1 r0 bottom value=0.1uF
C49 "885012206095" 0603 16.764,40.513 r270 bottom value=0.1uF
C50 "885012206095" 0603 11.557,40.386 r270 bottom value=0.1uF
C51 "885012206095" 0603 11.557,43.942 r270 bottom value=0.1uF
C52 "885012206095" 0603 14.097,44.704 r180 bottom value=0.1uF
C53 "885012206095" 0603 13.462,25.4 r0 bottom value=0.1uF
C54 "885012206095" 0603 16.764,27.813 r270 bottom value=0.1uF
C55 "885012206095" 0603 11.557,27.686 r270 bottom value=0.1uF
C56 "885012206095" 0603 11.557,31.242 r270 bottom value=0.1uF
C57 "885012206095" 0603 14.097,32.004 r180 bottom value=0.1uF
C58 "885012205037" 0402 103.251,45.999 r180 top value=0.1uF
C59 "885012205037" 0402 107.112,45.999 r180 top value=0.1uF
C60 "885012205037" 0402 114.3,21.082 r0 top value=0.1uF
C61 "Capacitor" 0402 99.822,33.401 r0 top value=0.47uF
C62 "885012205037" 0402 97.663,8.763 r90 top value=0.1uF
C63 "CL21A106KOQNNNG" 0805_HV 99.314,8.763 r90 top value=10uF
C64 "CL21A106KOQNNNG" 0805_HV 94.107,5.207 r0 top value=10uF
C65 "885012205037" 0402 94.107,6.858 r0 top value=0.1uF
C66 "885012205037" 0402 108.458,23.114 r90 bottom value=0.1uF
C67 "Capacitor" 0402 110.49,24.13 r90 bottom value=0.47uF
C68 "885012205037" 0402 104.648,15.494 r270 top value=0.1uF
C69 "Capacitor" 0402 104.013,33.401 r180 top value=0.47uF
C70 "885012205008" 0402 120.523,22.987 r90 top value=2200pF
C71 "C3216X7R2A105K160AA" 1206_180 30.48,52.197 r270 top value=1uF
D1 "BAT46W-7-F" SOD-123 79.375,40.005 r90 bottom value=100V
D2 "BAT46W-7-F" SOD-123 35.941,78.486 r0 top value=100V
D3 "150060RS75000" WL-SMCW_RED 7.747,90.805 r90 top value=Red
D4 "MMSZ5246B-7-F" SOD-123 21.971,96.774 r180 bottom value=16V
D5 "MMSZ5246B-7-F" SOD-123 55.753,87.63 r180 bottom value=16V
D6 "MMSZ5246B-7-F" SOD-123 55.753,80.645 r180 bottom value=16V
D7 "1N4148W-7-F" SOD-123 62.484,81.534 r270 bottom value=100V
D8 "MMSZ4697T1G" SOD-123 19.939,71.501 r0 top value=10V
D9 "BAT46W-7-F" SOD-123 78.232,78.486 r180 bottom value=100V
D10 "BAT46W-7-F" SOD-123 82.423,77.597 r90 bottom value=100V
D11 "BAT46W-7-F" SOD-123 75.946,90.043 r90 bottom value=100V
D12 "BAT46W-7-F" SOD-123 74.676,75.438 r270 bottom value=100V
D13 "BAS40W-7-F" SOT-323 17.907,32.893 r90 bottom value=40V
D14 "150060VS75000" WL-SMCW_GREEN 84.328,3.429 r90 top value=Green
D15 "150060VS75000" WL-SMCW_GREEN 87.249,3.429 r90 top value=Green
D16 "150060VS75000" WL-SMCW_GREEN 90.17,3.429 r90 top value=Green
E1 "Spark Gap" SPARK_GAP2 38.227,99.365 r0 bottom
E2 "Spark Gap" SPARK_GAP2 55.499,99.441 r0 bottom
E3 "Spark Gap" SPARK_GAP2 104.902,99.314 r0 bottom
E4 "Spark Gap" SPARK_GAP2 121.666,79.629 r270 bottom
E5 "Spark Gap" SPARK_GAP2 112.522,99.314 r0 bottom
E6 "Spark Gap" SPARK_GAP2 121.666,82.169 r270 bottom
F1 "SFK-3030" FUSE_SFK-xx30x 12.065,94.107 r90 top
FID1 "Fiducial" Fiducial10-20 118.872,87.232 r0 top
FID2 "Fiducial" Fiducial10-20 13.462,5.842 r0 top
FID3 "Fiducial" Fiducial10-20 118.872,13.462 r0 top
FID4 "Fiducial" Fiducial10-20 13.462,5.842 r180 bottom
FID5 "Fiducial" Fiducial10-20 118.872,87.232 r180 bottom
FID6 "Fiducial" Fiducial10-20 118.872,13.462 r180 bottom
H1 "SJ-5303 (CLEAR)" Bumpon_SJ5003Transparent 5.842,94.742 r180 bottom
H2 "SJ-5303 (CLEAR)" Bumpon_SJ5003Transparent 118.872,94.742 r180 bottom
H3 "SJ-5303 (CLEAR)" Bumpon_SJ5003Transparent 5.842,5.842 r180 bottom
H4 "SJ-5303 (CLEAR)" Bumpon_SJ5003Transparent 118.872,5.842 r180 bottom
J1 "OSTTE060161" FP-OSTTE060161_HDR6-MFG 3.048,72.517 r270 top
J2 "PEC05SAAN" Sullins_PxC05SAAN 75.438,97.282 r0 top
J3 "OSTTE050161" FP-OSTTE050161_HDR5-MFG 3.048,50.165 r270 top
J4 "OSTTE060161" FP-OSTTE060161_HDR6-MFG 3.048,27.94 r270 top
J5 "PEC06SAAN" Sullins_PEC06SAAN 91.44,97.282 r0 top
J6 "87898-0304" Molex_87898-0304 63.627,18.288 r0 top
J7 "87898-0304" Molex_87898-0304 52.197,18.288 r0 top
J8 "ED555/2DS" TERM_BLK_ED555-2DS 38.202,96.888 r180 top
J9 "OSTTE040161" FP-OSTTE040161_HDR4-MFG 57.277,97.473 r180 top
J10 "PEC02SAAN" CONN_PEC02SAAN 94.615,62.23 r180 top
J11 "87898-0304" Molex_87898-0304 69.977,26.416 r0 top
J12 "PEC02SAAN" CONN_PEC02SAAN 94.615,57.15 r180 top
J13 "87898-0304" Molex_87898-0304 81.407,26.416 r0 top
J14 "PEC06DAAN" CONN_PEC06DAAN 26.162,61.087 r270 top
J15 "PEC02SAAN" CONN_PEC02SAAN 94.615,52.07 r180 top
J16 "87898-0304" Molex_87898-0304 94.615,69.85 r90 top
J17 "22/05/3041" CONN_22-05-3041 125.222,80.899 r90 top
J18 "PEC02SAAN" CONN_PEC02SAAN 94.615,46.99 r180 top
J19 "87898-0304" Molex_87898-0304 94.615,80.01 r90 top
J20 "PEC02SAAN" CONN_PEC02SAAN 94.615,41.91 r180 top
J21 "PEC02SAAN" CONN_PEC02SAAN 94.615,36.83 r180 top
J22 "PEC05SAAN" Sullins_PxC05SAAN 107.442,97.282 r0 top
J23 "PEC10DAAN" SULLINS_PEC10DAAN 26.162,37.592 r0 top
J24 "PBC07SAAN" Sullins_xxC07SAAN 85.852,17.526 r0 top
J25 "PBC11SAAN" Sullins_xxC11SAAN 80.772,12.446 r0 top
J26 "CONN_USB_5Pos-6Shld" Molex_47346-1001 106.299,-0.508 r0 top
J27 "61300211121" WURTH_61300211121 113.284,15.494 r0 top
J28 "PEC05SAAN" Sullins_PxC05SAAN 122.809,45.339 r90 top
J29 "22284043" Molex_0022284043 122.682,21.082 r270 top
LOGO4 "DANGER HIGH VOLTAGE" IEC_HighVoltage_Medium 24.257,84.582 r180 bottom
LOGO5 "DANGER HIGH VOLTAGE" IEC_HighVoltage_Medium 59.182,84.582 r0 top locked
Logo8 "FCC disclaimer" FCC_disclaimer 22.352,1.397 r0 top
Logo9 "WEEE logo" WEEE_Minimum 37.469,10.014 r0 top
Logo10 "CAUTION.  READ USER GUIDE BEFORE USE" IEC_Caution_Medium 59.69,64.897 r0 top
NT1 "Net-Tie" Net-Tie_10milWide_30milLong 1.143,16.51 r0 top net-tie
NT2 "Net-Tie" Net-Tie_50milWide_30milLong 12.065,97.028 r180 top net-tie
NT3 "Net-Tie" Net-Tie_10mil 87.122,10.795 r0 bottom net-tie
NT4 "Net-Tie" Net-Tie_10mil 106.045,16.764 r0 top net-tie
NT5 "Net-Tie" Net-Tie_0805_HV_NoOverlay 117.094,55.626 r90 top net-tie
Q1 "FCX495TA" SOT-89-3 34.205,52.705 r90 top value="150 V"
Q2 "SI2325DS-T1-E3" SOT-23 28.575,93.218 r180 top value=-150V
Q3 "BSZ900N15NS3 G" PG-TSDSON-8 26.289,98.552 r0 top value=150V
Q4 "MMBT5401LT1G" SOT-23 17.78,70.358 r90 bottom value="150 V"
Q5 "SI2325DS-T1-E3" SOT-23 23.876,75.565 r180 top value=-150V
Q6 "SI2325DS-T1-E3" SOT-23 41.656,77.343 r270 top value=-150V
Q7 "BSC160N15NS5ATMA1" PG-TDSON-8 47.157,80.772 r180 top value=150V
Q8 "BSC160N15NS5ATMA1" PG-TDSON-8 26.035,80.772 r0 top value=150V
Q9 "BSC160N15NS5ATMA1" PG-TDSON-8 47.157,88.392 r180 top value=150V
Q10 "MOSFET_N_D3G1S2" SOT-323 55.753,84.963 r90 bottom value=60V
Q11 "MMBT5401LT1G" SOT-23 17.78,57.15 r90 bottom value="150 V"
Q12 "SI7898DP-E3" PowerPAK_SO-8 13.589,85.09 r180 top value=150V
Q13 "MMBT5401LT1G" SOT-23 17.78,44.45 r90 bottom value="150 V"
R1 "Resistor" 0603 77.343,39.116 r270 top value=100
R2 "CRCW120620R0FKEA" 1206 78.613,42.037 r180 top value=20.0
R3 "CRCW120620R0FKEA" 1206 78.613,44.45 r180 top value=20.0
R4 "CRCW120620R0FKEA" 1206 78.613,46.863 r180 top value=20.0
R5 "CRCW2512220RJNEG" 2512 36.703,73.152 r90 top value=220
R6 "CRCW2512220RJNEG" 2512 32.512,73.152 r90 top value=220
R7 "CRCW120620R0FKEA" 1206 77.343,50.546 r270 top value=20.0
R8 "CRCW120620R0FKEA" 1206 74.93,50.546 r270 top value=20.0
R9 "CRCW2512220RJNEG" 2512 36.703,62.357 r90 top value=220
R10 "CRCW2512220RJNEG" 2512 32.512,62.357 r90 top value=220
R11 "CRCW120620R0FKEA" 1206 72.517,50.546 r270 top value=20.0
R12 "CRCW120620R0FKEA" 1206 70.104,50.546 r270 top value=20.0
R13 "CRCW120620R0FKEA" 1206 67.691,50.546 r270 top value=20.0
R14 "CRCW120620R0FKEA" 1206 65.278,50.546 r270 top value=20.0
R15 "CRCW06030000Z0EA" 0603 70.485,33.655 r0 bottom value=0
R16 "CRCW120620R0FKEA" 1206 62.865,50.546 r270 top value=20.0
R17 "CRCW120620R0FKEA" 1206 60.452,50.546 r270 top value=20.0
R18 "CRCW120620R0FKEA" 1206 58.039,50.546 r270 top value=20.0
R19 "CRCW120620R0FKEA" 1206 55.499,50.546 r270 top value=20.0
R20 "CRCW060310K0JNEA" 0603 59.817,6.477 r270 bottom value=10k
R21 "CRCW120620R0FKEA" 1206 51.689,49.276 r0 top value=20.0
R22 "CRCW120620R0FKEA" 1206 51.689,46.863 r0 top value=20.0
R23 "CRCW120620R0FKEA" 1206 51.689,44.45 r0 top value=20.0
R24 "CRCW120620R0FKEA" 1206 51.689,42.037 r0 top value=20.0
R25 "CRCW060310K0JNEA" 0603 61.087,20.193 r90 bottom value=10k
R26 "CRCW0603100KJNEA" 0603 66.167,20.193 r90 bottom value=100k
R27 "Resistor" 0603 51.181,36.195 r0 top value=100
R28 "Resistor" 0603 51.181,38.227 r0 top value=100
R29 "CRCW060310K0JNEA" 0603 54.737,20.088 r90 bottom value=10k
R30 "Resistor" 1210M 46.736,37.211 r270 top value=0.001
R31 "Resistor" 0603 6.223,90.932 r270 top value=100
R32 "Resistor" 0603 5.842,81.28 r0 bottom value=1.0k
R33 "CRCW25124K70JNEG" 2512 22.987,94.615 r0 top value=4.7k
R34 "Resistor" 0603 5.842,77.851 r0 bottom value=1.0k
R35 "Resistor" 0603 31.496,93.218 r270 top value=10Meg
R36 "Resistor" 0603 5.842,74.295 r0 bottom value=1.0k
R37 "Resistor" 0603 5.842,70.739 r0 bottom value=1.0k
R38 "CRCW060320K0JNEA" 0603 19.177,67.31 r0 bottom value=20k
R39 "CRCW25124K70JNEG" 2512 19.685,78.867 r270 top value=4.7k
R40 "CRCW25124K70JNEG" 2512 47.498,75.057 r0 top value=4.7k
R41 "Resistor" 0603 19.177,52.324 r180 bottom value=100
R42 "Resistor" 0603 39.37,77.724 r270 top value=10Meg
R43 "Resistor" 0603 26.924,75.184 r270 top value=10Meg
R44 "RC0603FR-0795K3L" 0603 20.32,72.517 r90 bottom value=95.3k
R45 "CRCW12067K50JNEA" 1206 7.493,87.503 r0 top value=7.5k
R46 "Resistor" 2512_WIDE_VISHAY 24.384,88.011 r0 top value=0
R47 "Resistor" 0603 5.842,67.31 r0 bottom value=1.0k
R48 "CRCW12067K50JNEA" 1206 7.493,85.09 r180 top value=7.5k
R49 "Resistor" 0603 5.842,63.754 r0 bottom value=1.0k
R50 "Resistor" 0603 22.86,94.869 r0 bottom value=10Meg
R51 "Resistor" 0603 55.753,89.535 r0 bottom value=10Meg
R52 "Resistor" 0603 55.753,82.55 r0 bottom value=10Meg
R53 "Resistor" 0603 5.842,57.15 r0 bottom value=1.0k
R54 "Resistor" 0603 5.842,53.721 r0 bottom value=1.0k
R55 "CRCW060351R0JNEA" 0603 52.578,83.947 r0 bottom value=51
R56 "CRCW06030000Z0EA" 0603 52.578,91.186 r0 bottom value=0
R57 "Resistor" 0603 60.579,81.572 r90 bottom value=10k
R58 "CRCW060320K0JNEA" 0603 19.177,54.102 r0 bottom value=20k
R59 "Resistor" 0603 18.796,66.929 r0 top value=5.1k
R60 "RC0603JR-0762KL" 0603 17.907,60.96 r90 bottom value=62k
R61 "CRCW06035K10JNEA" 0603 69.088,69.723 r270 bottom value=5.1k
R62 "CRCW06035K10JNEA" 0603 77.724,72.771 r180 bottom value=5.1k
R63 "CRCW06035K10JNEA" 0603 75.438,70.612 r180 bottom value=5.1k
R64 "CRCW12065K10JNEA" 1206 73.406,82.169 r270 bottom value=5.1k
R65 "CRCW06037K50JNEA" 0603 74.168,78.994 r180 bottom value=7.5k
R66 "Resistor" 0603 18.796,68.326 r180 top value=20k
R67 "Resistor" 0603 19.177,39.624 r180 bottom value=100
R68 "CRCW12065K10JNEA" 1206 75.819,82.169 r90 bottom value=5.1k
R69 "Resistor" 0603 5.842,50.165 r0 bottom value=1.0k
R70 "CRCW12065K10JNEA" 1206 74.549,86.106 r0 bottom value=5.1k
R71 "CRCW12065K10JNEA" 1206 69.723,86.106 r0 bottom value=5.1k
R72 "Resistor" 0603 5.842,46.609 r0 bottom value=1.0k
R73 "CRCW12065K10JNEA" 1206 73.533,89.789 r270 bottom value=5.1k
R74 "CRCW12065K10JNEA" 1206 72.009,93.472 r0 bottom value=5.1k
R75 "Resistor" 0603 5.842,43.18 r0 bottom value=1.0k
R76 "CRCW12065K10JNEA" 1206 69.85,77.978 r0 bottom value=5.1k
R77 "CRCW12065K10JNEA" 1206 66.929,75.565 r0 bottom value=5.1k
R78 "Resistor" 0603 5.842,36.703 r0 bottom value=1.0k
R79 "CRCW060320K0JNEA" 0603 19.177,41.402 r0 bottom value=20k
R80 "CRCW060327K0JNEA" 0603 21.59,45.72 r0 bottom value=27k
R81 "Resistor" 0603 19.177,26.797 r180 bottom value=100
R82 "Resistor" 0603 17.653,30.607 r0 bottom value=5.1k
R83 "Resistor" 0603 5.842,33.147 r0 bottom value=1.0k
R84 "Resistor" 0603 5.842,29.718 r0 bottom value=1.0k
R85 "Resistor" 0603 5.842,26.162 r0 bottom value=1.0k
R86 "Resistor" 0603 5.842,22.606 r0 bottom value=1.0k
R87 "CRCW1206200RFKEA" 1206 29.845,66.167 r90 bottom value=200
R88 "CRCW1206200RFKEA" 1206 32.385,63.627 r90 bottom value=200
R89 "CRCW060310K0JNEA" 0603 67.437,28.216 r90 bottom value=10k
R90 "CRCW1206200RFKEA" 1206 29.845,61.087 r90 bottom value=200
R91 "CRCW0603100KJNEA" 0603 72.517,28.216 r90 bottom value=100k
R92 "CRCW060310K0JNEA" 0603 96.774,58.928 r180 bottom value=10k
R93 "CRCW1206200RFKEA" 1206 32.385,58.547 r90 bottom value=200
R94 "CRCW060310K0JNEA" 0603 96.774,53.848 r180 bottom value=10k
R95 "CRCW1206200RFKEA" 1206 29.845,56.007 r90 bottom value=200
R96 "CRCW1206200RFKEA" 1206 32.385,51.943 r90 bottom value=200
R97 "CRCW060310K0JNEA" 0603 96.774,48.768 r180 bottom value=10k
R98 "CRCW1206200RFKEA" 1206 29.845,47.752 r90 bottom value=200
R99 "CRCW060310K0JNEA" 0603 96.774,43.688 r180 bottom value=10k
R100 "CRCW1206200RFKEA" 1206 32.385,45.212 r90 bottom value=200
R101 "CRCW1206200RFKEA" 1206 29.845,42.672 r90 bottom value=200
R102 "CRCW1206200RFKEA" 1206 32.385,40.132 r90 bottom value=200
R103 "CRCW1206200RFKEA" 1206 29.845,37.592 r90 bottom value=200
R104 "CRCW1206200RFKEA" 1206 32.385,35.052 r90 bottom value=200
R105 "CRCW1206200RFKEA" 1206 29.845,32.512 r90 bottom value=200
R106 "CRCW1206200RFKEA" 1206 32.385,29.972 r90 bottom value=200
R107 "CRCW1206200RFKEA" 1206 29.845,27.432 r90 bottom value=200
R108 "CRCW1206200RFKEA" 1206 32.385,24.892 r90 bottom value=200
R109 "CRCW060310K0JNEA" 0603 92.329,9.779 r90 bottom value=10k
R110 "CRCW060310K0JNEA" 0603 90.932,9.779 r90 bottom value=10k
R111 "CRCW060310K0JNEA" 0603 83.312,9.779 r90 bottom value=10k
R112 "CRCW06030000Z0EA" 0603 100.838,41.402 r180 top value=0
R113 "CRCW06030000Z0EA" 0603 105.664,40.919 r0 top value=0
R114 "Resistor" 0402 105.41,6.858 r90 top value=33
R115 "Resistor" 0402 106.553,6.858 r90 top value=33
R116 "Resistor" 0402 107.696,6.858 r270 top value=2.0k
R117 "Resistor" 0402 108.204,5.08 r0 top value=10k
R118 "Resistor" 0402 109.601,6.223 r180 top value=1.0Meg
R119 "Resistor" 0402 109.601,7.366 r0 top value=1.0Meg
R120 "Resistor" 0402 84.328,6.223 r90 top value=330
R121 "Resistor" 0402 87.249,6.223 r90 top value=330
R122 "Resistor" 0402 90.17,6.223 r90 top value=330
R123 "Resistor" 0402 119.38,22.987 r90 top value=10k
RT1 "Thermistor" THERMISTOR_103AT-2 52.959,32.385 r180 top value=10k
RT2 "Thermistor" THERMISTOR_103AT-2 52.959,28.956 r180 top value=10k
S1 "SW_KST221JLFS" SW_KST221JLFS 58.293,5.207 r0 top
S2 "SW_KST221JLFS" SW_KST221JLFS 46.228,5.207 r180 top
S3 "PTS820 J20M SMTR LFS" SW_PTS820 121.412,29.337 r180 top
SH-J1 "SNT-100-BK-G" SNT-100-BK-G 26.162,38.862 r180 top value=1x2
SH-J2 "SNT-100-BK-G" SNT-100-BK-G 26.162,36.322 r180 top value=1x2
SH-J3 "SNT-100-BK-G" SNT-100-BK-G 26.162,33.782 r180 top value=1x2
SH-J4 "SNT-100-BK-G" SNT-100-BK-G 26.162,31.242 r180 top value=1x2
SH-J5 "SNT-100-BK-G" SNT-100-BK-G 26.162,28.702 r180 top value=1x2
SH-J6 "SNT-100-BK-G" SNT-100-BK-G 26.162,26.162 r180 top value=1x2
SH-J7 "SNT-100-BK-G" SNT-100-BK-G 26.162,67.437 r180 top value=1x2
SH-J8 "SNT-100-BK-G" SNT-100-BK-G 26.162,64.897 r180 top value=1x2
SH-J9 "SNT-100-BK-G" SNT-100-BK-G 26.162,62.357 r180 top value=1x2
SH-J10 "SNT-100-BK-G" SNT-100-BK-G 26.162,59.817 r180 top value=1x2
SH-J11 "SNT-100-BK-G" SNT-100-BK-G 26.162,57.277 r180 top value=1x2
SH-J12 "SNT-100-BK-G" SNT-100-BK-G 26.162,54.737 r180 top value=1x2
SH-J13 "SNT-100-BK-G" SNT-100-BK-G 50.927,18.288 r180 top value=1x2
SH-J14 "SNT-100-BK-G" SNT-100-BK-G 64.897,18.415 r180 top value=1x2
SH-J15 "SNT-100-BK-G" SNT-100-BK-G 71.247,26.416 r180 top value=1x2
SH-J16 "SNT-100-BK-G" SNT-100-BK-G 94.615,71.12 r90 top value=1x2
SH-J17 "SNT-100-BK-G" SNT-100-BK-G 94.615,81.28 r90 top value=1x2
SH-J18 "SNT-100-BK-G" SNT-100-BK-G 26.162,49.022 r180 top value=1x2
SH-J19 "SNT-100-BK-G" SNT-100-BK-G 26.162,46.482 r180 top value=1x2
SH-J20 "SNT-100-BK-G" SNT-100-BK-G 26.162,43.942 r180 top value=1x2
SH-J21 "SNT-100-BK-G" SNT-100-BK-G 26.162,41.402 r180 top value=1x2
TP1 "TESTPOINT" Keystone5010 3.175,86.487 r0 top
TP2 "TESTPOINT" TP_VIA_060RND040 81.661,39.878 r0 top
TP3 "TESTPOINT" TP_VIA_060RND040 77.978,36.322 r0 top
TP4 "TESTPOINT" TP_VIA_060RND040 77.978,33.02 r0 top
TP5 "TESTPOINT" TP_VIA_060RND040 83.312,33.179 r0 top
TP6 "TESTPOINT" TP_VIA_060RND040 61.468,12.446 r0 top
TP7 "TESTPOINT" TP_VIA_060RND040 56.515,32.385 r0 top
TP8 "TESTPOINT" TP_VIA_060RND040 56.515,28.956 r90 top
TP9 "TESTPOINT" Keystone5011 3.175,14.097 r0 top
TP10 "TESTPOINT" TP_50MIL-25MILHOLE 59.182,26.289 r90 top
TP11 "TESTPOINT" TP_50MIL-25MILHOLE 50.165,12.446 r0 top
TP12 "TESTPOINT" TP_50MIL-25MILHOLE 54.991,36.195 r90 top
TP13 "TESTPOINT" TP_50MIL-25MILHOLE 54.991,38.227 r90 top
TP14 "5006" Keystone5006 18.542,23.622 r0 top
TP15 "5006" Keystone5006 15.748,78.994 r0 top
TP16 "5006" Keystone5006 83.312,88.392 r0 top
TP17 "5006" Keystone5006 45.847,12.446 r0 top
TP18 "TESTPOINT" TP_VIA_060RND040 83.312,36.322 r90 top
TP19 "TESTPOINT" TP_VIA_060RND040 42.672,35.687 r90 top
TP20 "TESTPOINT" TP_VIA_060RND040 30.226,97.409 r90 top
TP21 "TESTPOINT" TP_VIA_060RND040 19.431,89.027 r90 top
TP22 "TESTPOINT" TP_VIA_060RND040 53.721,76.835 r90 top
TP23 "TESTPOINT" TP_VIA_060RND040 32.258,89.789 r90 top
TP24 "TESTPOINT" TP_VIA_060RND040 9.017,82.677 r90 top
TP25 "TESTPOINT" TP_VIA_060RND040 42.672,67.818 r90 top
TP26 "TESTPOINT" TP_VIA_060RND040 26.162,72.517 r90 top
TP27 "TESTPOINT" TP_VIA_060RND040 42.672,71.882 r90 top
TP28 "TESTPOINT" TP_VIA_060RND040 70.993,80.772 r90 top
TP29 "TESTPOINT" TP_VIA_060RND040 18.415,73.914 r90 top
TP30 "TESTPOINT" TP_VIA_060RND040 70.993,70.612 r90 top
TP31 "TESTPOINT" TP_VIA_060RND040 78.105,75.692 r90 top
TP32 "TESTPOINT" TP_VIA_060RND040 78.105,70.612 r90 top
TP33 "TESTPOINT" TP_VIA_060RND040 78.105,86.106 r90 top
TP34 "TESTPOINT" TP_VIA_060RND040 70.993,75.692 r90 top
TP35 "TESTPOINT" TP_VIA_060RND040 78.105,80.772 r90 top
TP36 "TESTPOINT" TP_VIA_060RND040 42.672,38.735 r90 top
TP37 "TESTPOINT" TP_50MIL-25MILHOLE 90.17,62.23 r90 top
TP38 "TESTPOINT" TP_50MIL-25MILHOLE 90.17,57.15 r90 top
TP39 "TESTPOINT" TP_50MIL-25MILHOLE 90.17,52.07 r90 top
TP40 "TESTPOINT" TP_50MIL-25MILHOLE 90.17,46.99 r90 top
TP41 "TESTPOINT" TP_50MIL-25MILHOLE 61.849,26.289 r90 top
TP42 "TESTPOINT" TP_50MIL-25MILHOLE 104.267,37.592 r90 top
TP43 "5005" Keystone5005 102.489,7.112 r0 top value=Red
TP44 "5005" Keystone5005 93.599,2.032 r0 top value=Red
TP45 "TESTPOINT" TP_SM_1MM 119.38,17.526 r90 top
U1 "bq76952PFBT" PFB0048A_N 65.532,37.592 r270 top locked
U2 "BQ771807DPJR" DPJ0008A 14.097,67.31 r90 bottom
U3 "BQ771807DPJR" DPJ0008A 14.097,54.102 r90 bottom
U4 "BQ771807DPJR" DPJ0008A 14.097,41.402 r90 bottom
U5 "BQ771807DPJR" DPJ0008A 14.097,28.702 r90 bottom
U6 "TPD1E10B06DPYR" DPY0002A#1 104.572,95.631 r180 bottom
U7 "TPD1E10B06DPYR" DPY0002A#1 117.729,79.299 r270 bottom
U8 "TPD1E10B06DPYR" DPY0002A#1 112.192,95.631 r180 bottom
U9 "TPD1E10B06DPYR" DPY0002A#1 117.729,82.499 r90 bottom
U10 "SN74LVC2T45DCTR" DCT0008A_N 104.521,43.713 r0 top
U11 "CMP-0038965-1" PN0080A_N 104.775,24.892 r270 top
U12 "TPD1E10B06DPYT" DPY0002A#1 105.664,3.556 r90 bottom
U13 "TPD1E10B06DPYT" DPY0002A#1 106.807,3.556 r90 bottom
U14 "CMP-0035539-1" DBV0005A_N 94.869,9.271 r180 top
U15 "TPD1E10B06DPYT" DPY0002A#2 120.65,19.482 r270 top
U16 "TPD1E10B06DPYT" DPY0002A#2 119.888,21.082 r0 top
Y1 "CSTCR4M00G55B-R0" Murata_CSTCR_G 114.808,24.384 r90 top
ZZ1 "These assemblies are ESD sensitive, ESD precautions shall be observed." AssemblyNote 4.572,111.252 r0 top
ZZ2 "These assemblies must be clean and free from flux and all contaminants. Use of no clean flux is not acceptable." AssemblyNote 4.572,108.712 r0 top
ZZ3 "These assemblies must comply with workmanship standards IPC-A-610 Class 2, unless otherwise specified." AssemblyNote 4.572,106.172 r0 top

## Footprints (in the part's own frame and the unit in brackets; to place one, negate y for a bottom-side part, rotate by r counter-clockwise, add the part's x,y. Pads: shape width x height; smd on the part's side, far side on the other; paste and mask are expansions set on the pad)
0402 [mm] "0402 from SM-752 data"
  rect 0.8x0.6 smd: 1(-0.6,0) 2(0.6,0)
  silkscreen extent -1.22,-0.52 1.22,0.52, body extent -0.55,-0.3 0.55,0.3, height 0.6
0603 [mm] "0603 from SM-752 data"
  rect 1x0.95 smd: 1(-0.8,0) 2(0.8,0)
  silkscreen extent -1.52,-0.69 1.52,0.69, body extent -0.87,-0.47 0.87,0.47, height 1
0603S [mil]
  rect 20x35 smd: 1(-30,0) 2(30,0)
  body extent -34,-19 34,19, height 39
0805_HV [mil] "0805 with 30mil clearance between pads"
  rect 50x63 smd: 1(-40,0) 2(40,0)
  silkscreen extent -74,-40 74,40, body extent -43,-29 43,29, height 57
1206 [mm] "1206 from SM-752 data"
  rect 1.3x1.85 smd: 1(-1.45,0) 2(1.45,0)
  silkscreen extent -2.4,-1.21 2.4,1.21, body extent -1.7,-0.9 1.7,0.9, height 1.35
1206_180 [mm] "1206_180"
  rect 1.1x1.6 smd: 1(-1.7,0) 2(1.7,0)
  silkscreen extent -0.9,-1 0.9,1, body extent -1.75,-0.95 1.75,0.95, height 1.8
1210M [mm] "1210 from SM-752 data"
  rect 1.5x2.8 smd: 1(-1.55,0) 2(1.55,0)
  silkscreen extent -2.75,-1.85 2.75,1.85, body extent -1.7,-1.35 1.7,1.35, height 1.35
2512 [mm] "Chip Resistor, Body 6.3x3.2mm, IPC Medium Density"
  rect 1.3x3.4 smd: 1(-2.95,0) 2(2.95,0)
  silkscreen extent -1.9,-1.6 1.9,1.6, body extent -3.22,-1.67 3.22,1.67, height 0.71
2512_WIDE_VISHAY [mm] "Vishay recommended land pattern"
  rect 1.9x7.6 smd: 1(-1.55,0) 2(1.55,0)
  silkscreen extent -0.3,-3.32 0.3,3.35, body extent -1.7,-3.25 1.7,3.25, height 0.9
AssemblyNote [mm] "Assembly Note"
Bumpon_SJ5003Transparent [mil] "3M Hemispherical Bumpon transparent"
  round 1 on Mech4: 0(0,0)
  silkscreen extent -228,-228 228,228, body extent -219,-219 219,219, height 197
CONN_22-05-3041 [mm] "MOLEX"
  rect 1.65x1.65 hole 1.02: 1(-3.81,5.7)
  round 1.65 hole 1.02: 2(-1.27,5.7) 3(1.27,5.7) 4(3.81,5.7)
  silkscreen extent -5,0 5,4.18, body extent -5,-6.91 5,6.02, height 6.37
CONN_PEC02SAAN [mm] "SULLINS"
  rrect7% 1.5x1.5 hole 1.016: 1(-1.27,0)
  round 1.5 hole 1.016: 2(1.27,0)
  silkscreen extent -2.54,-1.52 2.54,1.27, body extent -2.54,-1.27 2.54,1.27, height 8.38
CONN_PEC06DAAN [mm] "SULLINS"
  rect 1.65x1.65 hole 1.016 mask+0: 1(-6.35,-1.27)
  round 1.65 hole 1.016 mask+0: 2(-6.35,1.27) 3(-3.81,-1.27) 4(-3.81,1.27) 5(-1.27,-1.27) 6(-1.27,1.27) 7(1.27,-1.27) 8(1.27,1.27) 9(3.81,-1.27) 10(3.81,1.27) 11(6.35,-1.27) 12(6.35,1.27)
  silkscreen extent -8.72,-2.6 7.62,2.54, body extent -7.62,-2.54 7.62,2.54, height 8.38
DBV0005A_N [mm] "SOT23, 5-Leads, Body 2.9x1.6mm, Pitch 0.95mm, Lead Span 2.8mm, IPC Medium Density"
  rrect17% 1x0.6 smd: 1(-1.375,0.95) 2(-1.375,0) 3(-1.375,-0.95) 4(1.375,-0.95) 5(1.375,0.95)
  silkscreen extent -0.25,-1.55 0.25,1.55, body extent -1.42,-1.46 1.42,1.46, height 1.09
DCT0008A_N [mm] "TSOP, 8-Leads, Body 3x2.8mm, Pitch 0.65mm, IPC Medium Density"
  oval 1.05x0.4 smd: 1(-1.975,0.975) 2(-1.975,0.325) 3(-1.975,-0.325) 4(-1.975,-0.975) 5(1.975,-0.975) 6(1.975,-0.325) 7(1.975,0.325) 8(1.975,0.975)
  silkscreen extent -2.32,-1.57 0.6,1.58, body extent -2.01,-1.47 2.01,1.48, height 1.3
DPJ0008A [mm]
  oval 0.7x0.25 smd: 1(-1.85,0.95) 2(-1.85,0.325) 3(-1.85,-0.325) 4(-1.85,-0.975) 5(1.85,-0.975) 6(1.85,-0.325) 7(1.85,0.325) 8(1.85,0.95)
  rect 2.4x2.4 smd paste-1.2: 9(0,0)
  silkscreen extent -2.15,-1.65 2.15,1.65, body extent -2.05,-1.55 2.05,1.55, height 0.81
DPY0002A#1 [mm] "X1SON-2"
  rrect57% 0.35x0.6 smd paste-0.5 mask-0.05: 1(-0.325,0) 2(0.325,0)
  rrect33% 0.3x0.5 on Bottom Paste: 1S(-0.35,0) 2S(0.35,0)
  body extent -0.5,-0.3 0.5,0.3, height 0.45
DPY0002A#2 [mm] "X1SON-2"
  rrect57% 0.35x0.6 smd paste-0.5 mask-0.05: 1(-0.325,0) 2(0.325,0)
  rrect33% 0.3x0.5 on Top Paste: 1S(-0.35,0) 2S(0.35,0)
  body extent -0.5,-0.3 0.5,0.3, height 0.45
FCC_disclaimer [mm]
Fiducial10-20 [mm]
  round 1 smd mask+0.5: 1(0,0)
  Layer 1 - Top Layer keep-out circle w1.178: c0,0 r0.5
FP-OSTTE040161_HDR4-MFG [mm]
  rrect6% 1.7x1.7 hole 1.1 paste-1000 mask+0: 1(-5.25,0.1)
  round 1.7 hole 1.1 paste-1000 mask+0: 2(-1.75,0.1) 3(1.75,0.1) 4(5.25,0.1)
  body extent -7.68,-3.75 7.68,3.75, height 0.25
FP-OSTTE050161_HDR5-MFG [mm]
  rrect6% 1.7x1.7 hole 1.1 paste-1000 mask+0: 1(-7,0.1)
  round 1.7 hole 1.1 paste-1000 mask+0: 2(-3.5,0.1) 3(0,0.1) 4(3.5,0.1) 5(7,0.1)
  body extent -9.43,-3.75 9.43,3.75, height 0.25
FP-OSTTE060161_HDR6-MFG [mm]
  rrect6% 1.7x1.7 hole 1.1 paste-1000 mask+0: 1(-8.75,0.1)
  round 1.7 hole 1.1 paste-1000 mask+0: 2(-5.25,0.1) 3(-1.75,0.1) 4(1.75,0.1) 5(5.25,0.1) 6(8.75,0.1)
  body extent -11.17,-3.75 11.17,3.75, height 0.25
FUSE_SFK-xx30x [mm] "Fuse"
  rect 7.4x1.2 smd paste+0 mask+0.07: 1(0,2.05) 3(0,-2.05)
  rect 0.75x3 smd paste+0 mask+0.07: 2(-5.575,0)
  Layer 1 - Top Layer region: -5.2,1.5 -5.2,-1.5 -3.8,-0.35 -3.8,0.35
  silkscreen extent -4.75,-2.5 4.75,2.5, body extent -4.75,-2.5 4.75,2.5, height 2
IEC_Caution_Medium [mm]
  silkscreen extent -5.51,-4.64 5.51,4.91
IEC_HighVoltage_Medium [mm]
  silkscreen extent -5.51,-4.46 5.51,5.09
Keystone5005 [mil] "Keystone Compact loops"
  round 87 hole 63: 1(0,0)
  silkscreen extent -70,-70 70,70, body extent -63,-63 62,63, height 225
Keystone5006 [mil] "Keystone Compact loops"
  round 87 hole 63: 1(0,0)
  silkscreen extent -70,-70 70,70, body extent -63,-63 62,63, height 225
Keystone5010 [mil] "Keystone Multipurpose loops"
  round 87 hole 63: 1(0,0)
  silkscreen extent -70,-70 70,70, body extent -63,-63 63,62, height 319
Keystone5011 [mil] "Keystone Multipurpose loops"
  round 87 hole 63: 1(0,0)
  silkscreen extent -70,-70 70,70, body extent -63,-63 63,62, height 319
Molex_47346-1001 [mm] "Receptacle, 0.65mm, 5x1, R/A, SMT"
  rect 0.45x1.38 smd: 1(-1.3,4.11) 2(-0.65,4.11) 3(0,4.11) 4(0.65,4.11) 5(1.3,4.11)
  rect 1.475x2.1 smd: 6(-2.462,3.75) 7(2.462,3.75)
  rect 2.375x1.95 smd: 8(-2.913,1.45) 11(2.913,1.45)
  rect 1.175x1.95 smd: 9(-0.837,1.45) 10(0.837,1.45)
  silkscreen extent -3.75,2.83 3.75,5.67, body extent -3.9,-0.7 3.9,4.3, height 2.68
Molex_87898-0304 [mm] "Header, 2.54mm, 3x1, SMT"
  rrect8% 1.27x2.96 smd: 1(-2.54,1.8) 2(0,-1.8) 3(2.54,1.8)
  silkscreen extent -4.1,-1.26 3.81,1.25, body extent -3.81,-2.4 3.81,2.4, height 9.65
Molex_0022284043 [mm] "Header, 2.54mm, 4x1, TH"
  rect 1.55x1.55 hole 1.02: 1(-3.81,0)
  round 1.55 hole 1.02: 2(-1.27,0) 3(1.27,0) 4(3.81,0)
  silkscreen extent -5.08,-1.24 5.08,1.5, body extent -5.08,-1.24 5.08,1.24, height 8.4
Murata_CSTCR_G [mm] "Murata"
  rect 0.4x2.6 smd: 1(-1.5,0) 2(0,0) 3(1.5,0)
  Layer 1 - Top Layer region: -0.4,0.8 0.4,0.8 0.4,1.3 -0.4,1.3
  Layer 1 - Top Layer region: -0.4,-1.301 -0.4,-0.801 0.4,-0.801 0.4,-1.301
  Layer 1 - Top Layer region: -1.9,0.8 -1.1,0.8 -1.1,1.3 -1.9,1.3
  Layer 1 - Top Layer region: -1.9,-1.301 -1.9,-0.801 -1.1,-0.801 -1.1,-1.301
  Layer 1 - Top Layer region: 1.1,0.8 1.9,0.8 1.9,1.3 1.1,1.3
  Layer 1 - Top Layer region: 1.1,-1.301 1.1,-0.801 1.9,-0.801 1.9,-1.301
  body extent -2.25,-1 2.25,1, height 1.16
Net-Tie_10mil [mil] "10mil net tie, no solder mask opening, no solder paste"
  rect 10x10 smd paste-5 mask-5: 1(-10,0) 2(10,0)
  Layer 1 - Top Layer region: -6,5 6,5 6,-5 -6,-5
Net-Tie_10milWide_30milLong [mil] "10mil net tie, no solder mask opening, no solder paste"
  rect 30x10 smd paste-5 mask-5: 1(-15,0) 2(15,0)
Net-Tie_50milWide_30milLong [mil] "50mil net tie, no solder mask opening, no solder paste"
  rect 30x200 smd paste-20 mask-20: 1(-15,0) 2(15,0)
Net-Tie_0805_HV_NoOverlay [mil] "0805_HV pads tied by 10mil copper trace which can be cut.  An 0805 part can be placed on pads."
  rect 50x63 smd paste-25: 1(-40,0) 2(40,0)
  Layer 1 - Top Layer lines w10: -16,0 16,0
  Layer 1 - Top Layer keep-out lines w1: -22,30.91 -22,-30.91 ; -14.96,30.91 14.96,30.91 ; 22,30.91 22,-30.91 ; -14.96,-30.91 14.96,-30.91
PFB0048A_N [mm] "Thin QFP, 48-Leads, Body 7x7mm, Pitch 0.5mm, IPC Medium Density"
  oval 1.45x0.3 smd: 1(-4.225,2.75) 2(-4.225,2.25) 3(-4.225,1.75) 4(-4.225,1.25) 5(-4.225,0.75) 6(-4.225,0.25) 7(-4.225,-0.25) 8(-4.225,-0.75) 9(-4.225,-1.25) 10(-4.225,-1.75) 11(-4.225,-2.25) 12(-4.225,-2.75) 25(4.225,-2.75) 26(4.225,-2.25) 27(4.225,-1.75) 28(4.225,-1.25) 29(4.225,-0.75) 30(4.225,-0.25) 31(4.225,0.25) 32(4.225,0.75) 33(4.225,1.25) 34(4.225,1.75) 35(4.225,2.25) 36(4.225,2.75)
  oval 0.3x1.45 smd: 13(-2.75,-4.225) 14(-2.25,-4.225) 15(-1.75,-4.225) 16(-1.25,-4.225) 17(-0.75,-4.225) 18(-0.25,-4.225) 19(0.25,-4.225) 20(0.75,-4.225) 21(1.25,-4.225) 22(1.75,-4.225) 23(2.25,-4.225) 24(2.75,-4.225) 37(2.75,4.225) 38(2.25,4.225) 39(1.75,4.225) 40(1.25,4.225) 41(0.75,4.225) 42(0.25,4.225) 43(-0.25,4.225) 44(-0.75,4.225) 45(-1.25,4.225) 46(-1.75,4.225) 47(-2.25,4.225) 48(-2.75,4.225)
  silkscreen extent -4.17,-2.75 2.75,3.58, body extent -4.5,-4.5 4.5,4.5, height 1.07
PG-TDSON-8 [mm] "Infineon recommended land pattern"
  rect 1.2x0.65 smd: 1(-2.825,1.905) 2(-2.825,0.635) 3(-2.825,-0.635) 4(-2.825,-1.905)
  rect 0.5x0.7 smd: 5(3.175,-2) 6(3.175,-0.675) 7(3.175,0.675) 8(3.175,2)
  rect 4.5x4.7 smd paste-2.25: 9(0.675,0)
  silkscreen extent -3.74,-3 3.74,3, body extent -3.18,-2.89 3.18,2.9, height 1.1
PG-TSDSON-8 [mm] "Infineon recommended land pattern"
  rect 0.8x0.34 smd: 1(-1.538,0.975) 2(-1.538,0.325) 3(-1.538,-0.325) 4(-1.538,-0.975)
  rect 0.65x0.34 smd: 5(1.538,-0.975) 6(1.538,-0.325) 7(1.538,0.325) 8(1.538,0.975)
  rect 1.71x2.29 smd: 9(0.358,0)
  silkscreen extent -2.22,-1.8 2.22,1.8, body extent -1.7,-1.7 1.7,1.7, height 1.1
PN0080A_N [mm] "QFP, 80-Leads, Body 12x12mm, Pitch 0.5mm, IPC Medium Density"
  oval 1.45x0.3 smd: 1(-6.725,4.75) 2(-6.725,4.25) 3(-6.725,3.75) 4(-6.725,3.25) 5(-6.725,2.75) 6(-6.725,2.25) 7(-6.725,1.75) 8(-6.725,1.25) 9(-6.725,0.75) 10(-6.725,0.25) 11(-6.725,-0.25) 12(-6.725,-0.75) 13(-6.725,-1.25) 14(-6.725,-1.75) 15(-6.725,-2.25) 16(-6.725,-2.75) 17(-6.725,-3.25) 18(-6.725,-3.75) 19(-6.725,-4.25) 20(-6.725,-4.75) 41(6.725,-4.75) 42(6.725,-4.25) 43(6.725,-3.75) 44(6.725,-3.25) 45(6.725,-2.75) 46(6.725,-2.25) 47(6.725,-1.75) 48(6.725,-1.25) 49(6.725,-0.75) 50(6.725,-0.25) 51(6.725,0.25) 52(6.725,0.75) 53(6.725,1.25) 54(6.725,1.75) 55(6.725,2.25) 56(6.725,2.75) 57(6.725,3.25) 58(6.725,3.75) 59(6.725,4.25) 60(6.725,4.75)
  oval 0.3x1.45 smd: 21(-4.75,-6.725) 22(-4.25,-6.725) 23(-3.75,-6.725) 24(-3.25,-6.725) 25(-2.75,-6.725) 26(-2.25,-6.725) 27(-1.75,-6.725) 28(-1.25,-6.725) 29(-0.75,-6.725) 30(-0.25,-6.725) 31(0.25,-6.725) 32(0.75,-6.725) 33(1.25,-6.725) 34(1.75,-6.725) 35(2.25,-6.725) 36(2.75,-6.725) 37(3.25,-6.725) 38(3.75,-6.725) 39(4.25,-6.725) 40(4.75,-6.725) 61(4.75,6.725) 62(4.25,6.725) 63(3.75,6.725) 64(3.25,6.725) 65(2.75,6.725) 66(2.25,6.725) 67(1.75,6.725) 68(1.25,6.725) 69(0.75,6.725) 70(0.25,6.725) 71(-0.25,6.725) 72(-0.75,6.725) 73(-1.25,6.725) 74(-1.75,6.725) 75(-2.25,6.725) 76(-2.75,6.725) 77(-3.25,6.725) 78(-3.75,6.725) 79(-4.25,6.725) 80(-4.75,6.725)
  silkscreen extent -6.85,-5.6 5.6,5.6, body extent -7,-7 7,7, height 1.56
PowerPAK_SO-8 [mil] "Vishay PowerPAK SO-8, Body 5.3x6.0mm (max), Pitch 1.27mm, IPC Medium Density"
  rect 50x24 smd mask+2.99: 1(-109.5,75) 2(-109.5,25) 3(-109.5,-25) 4(-109.5,-75)
  rect 48x24 smd mask+2.99: 5(109.5,-75) 8(109.5,75)
  rect 48x24 smd paste-12 mask+2.99: 6(109.5,-25) 7(109.5,25)
  rect 150x154 smd paste-75 mask+2.99: 9(22.5,0)
  silkscreen extent -130,-104 59,104, body extent -121,-102 121,102, height 43
SNT-100-BK-G [mil] "Samtec STEP model"
  round 1 on Mech3: 0(0,0)
  body extent -100,-50 100,50, height 344
SOD-123 [mm] "On Semi recommended land pattern"
  rect 0.915x1.22 smd: 1(-1.637,0) 2(1.637,0)
  silkscreen extent -2.74,-1.17 2.03,1.17, body extent -1.93,-0.9 1.93,0.9, height 1.35
SOT-23 [mm] "SOT23, 3-Leads, Body 2.9x1.3mm, Pitch 0.95mm, Lead Span 2.5mm, IPC Medium Density"
  rrect50% 1x0.6 smd: 1(-1.2,0.95) 2(-1.2,-0.95) 3(1.2,0)
  silkscreen extent -1.62,-1.5 0.7,1.5, body extent -1.16,-1.45 1.21,1.45, height 1
SOT-89-3 [mm] "SOT, 3-Leads, Body 4.6 x 2.6 mm, Pitch 1.5mm"
  rect 1.4x0.9 smd: 1(-1.9,1.5) 3(-1.9,-1.5)
  rect 1.8x0.9 smd: 2(-1.7,0)
  oct 3.4x1.9 smd: 4(0.9,0)
  silkscreen extent -1.3,-2.45 1.33,2.45, body extent -2.42,-2.28 1.83,2.32, height 1.62
SOT-323 [mm] "Diodes Inc recommended land pattern.  2016-02-24"
  rrect21% 0.6x0.47 smd: 1(-0.95,0.65) 2(-0.95,-0.65) 3(0.95,0)
  silkscreen extent -1.14,-1.22 0.77,1.22, body extent -1.13,-1.13 1.12,1.12, height 1.13
SPARK_GAP2 [mil] "Copied from PADS legacy libraries."
  rect 10x20 smd: 1(0,20) 2(0,-10)
  Layer 1 - Top Layer region: -15,30 -25,30 -25,-30 25,-30 25,30 15,30 15,-20 -15,-20 -15,30
Sullins_PEC06SAAN [mm] "TH, 6-Leads, Body 608x100mil, Pitch 100mil"
  rect 1.5x1.5 hole 1.016: 1(-6.35,0)
  round 1.5 hole 1.016: 2(-3.81,0) 3(-1.27,0) 4(1.27,0) 5(3.81,0) 6(6.35,0)
  silkscreen extent -8.64,-1.27 7.72,1.27, body extent -7.72,-1.27 7.72,1.27, height 8.59
SULLINS_PEC10DAAN [mm] "SULLINS"
  rrect50% 1.55x1.55 hole 1.016: 1(-1.27,11.43)
  round 1.55 hole 1.016: 2(1.27,11.43) 3(-1.27,8.89) 4(1.27,8.89) 5(-1.27,6.35) 6(1.27,6.35) 7(-1.27,3.81) 8(1.27,3.81) 9(-1.27,1.27) 10(1.27,1.27) 11(-1.27,-1.27) 12(1.27,-1.27) 13(-1.27,-3.81) 14(1.27,-3.81) 15(-1.27,-6.35) 16(1.27,-6.35) 17(-1.27,-8.89) 18(1.27,-8.89) 19(-1.27,-11.43) 20(1.27,-11.43)
  silkscreen extent -2.9,-12.7 2.54,12.7, body extent -2.54,-12.7 2.54,12.7, height 8.38
Sullins_PxC05SAAN [mm] "Header, 2.54mm, 5x1, TH"
  rect 1.55x1.55 hole 1.016: 1(-5.08,0)
  round 1.55 hole 1.016: 2(-2.54,0) 3(0,0) 4(2.54,0) 5(5.08,0)
  silkscreen extent -6.35,-1.75 6.35,1.27, body extent -6.35,-1.27 6.35,1.27, height 5.84
Sullins_xxC07SAAN [mm] "Header, 2.54 mm, 7x1, TH"
  rect 1.55x1.55 hole 1.016: 1(-7.62,0)
  round 1.55 hole 1.016: 2(-5.08,0) 3(-2.54,0) 4(0,0) 5(2.54,0) 6(5.08,0) 7(7.62,0)
  silkscreen extent -8.89,-1.27 8.89,1.7, body extent -8.89,-1.27 8.89,1.27, height 8.38
Sullins_xxC11SAAN [mm] "Header, 2.54 mm, 11x1, TH"
  rect 1.55x1.55 hole 1.016: 1(-12.7,0)
  round 1.55 hole 1.016: 2(-10.16,0) 3(-7.62,0) 4(-5.08,0) 5(-2.54,0) 6(0,0) 7(2.54,0) 8(5.08,0) 9(7.62,0) 10(10.16,0) 11(12.7,0)
  silkscreen extent -13.97,-1.27 13.97,1.7, body extent -13.97,-1.27 13.97,1.27, height 8.38
SW_KST221JLFS [mm] "C&K"
  rect 2.8x1 smd: 1(-2.9,2) 2(2.9,2) 3(-2.9,-2) 4(2.9,-2)
  body extent -3.25,-3.25 3.25,3.25, height 5
SW_PTS820 [mm] "SMT, 2-Leads, Body 3.9x2.9mm"
  rect 0.95x1.4 smd: 1(-2.075,0) 2(2.075,0)
  round 0.8 hole 0.8 unplated: MH1(0,0.9) MH2(0,-0.9)
  rect 1.15x0.75 smd: MP1(-1.575,1.525) MP2(1.575,1.525) MP3(1.575,-1.525) MP4(-1.575,-1.525)
  silkscreen extent -2.45,-2.2 2.45,2.2, body extent -2.25,-1.45 2.25,1.45, height 2
TERM_BLK_ED555-2DS [mil]
  rrect4% 100x100 hole 50: 1(0,0)
  round 100 hole 50: 2(138,0)
  silkscreen extent -93,-161 215,113, body extent -69,-150 207,106, height 323
THERMISTOR_103AT-2 [mil] "SEMITEC"
  rect 65x65 hole 35: 1(-50,0)
  round 65 hole 35: 2(50,0)
  body extent -78,-47 79,47, height 338
TP_50MIL-25MILHOLE [mm]
  round 1.27 hole 0.635: 1(0,0)
TP_SM_1MM [mm] "1mm Test Point, SMT"
  round 1 smd paste-0.5: 1(0,0)
TP_VIA_060RND040 [mil] "TP_VIA_060RND040"
  round 60 hole 40: 1(0,0)
WEEE_Minimum [mm] "WEEElie bin"
  silkscreen extent -2.42,-4.38 2.52,2.65
WL-SMCW_GREEN [mm] "WURTH"
  rect 0.8x0.8 smd: 1(-0.8,0) 2(0.8,0)
  silkscreen extent -1.9,-0.8 1.2,0.8, body extent -0.85,-0.45 0.85,0.45, height 0.8
WL-SMCW_RED [mm] "WURTH"
  rect 0.8x0.8 smd: 1(-0.8,0) 2(0.8,0)
  silkscreen extent -1.9,-0.8 1.2,0.8, body extent -0.85,-0.45 0.85,0.45, height 0.8
WURTH_61300211121 [mm] "Header, 2.54mm, 2x1, TH"
  rrect50% 1.65x1.65 hole 1.15: 1(-1.27,0)
  round 1.65 hole 1.15: 2(1.27,0)
  body extent -2.54,-1.27 2.54,1.27, height 8.54